# Altium PCB phoenix-c1.PcbDoc (part 1 of 3)
Units mm, origin at the board's own origin, x right, y up, seen from the top; angles counter-clockwise.
Board outline 40 x 40 mm, 4 copper layers (Top Layer, Layer 1, Layer 2, Bottom Layer), stack 1.58 mm thick; 71 components, 54 nets, 294 pads, 188 vias.
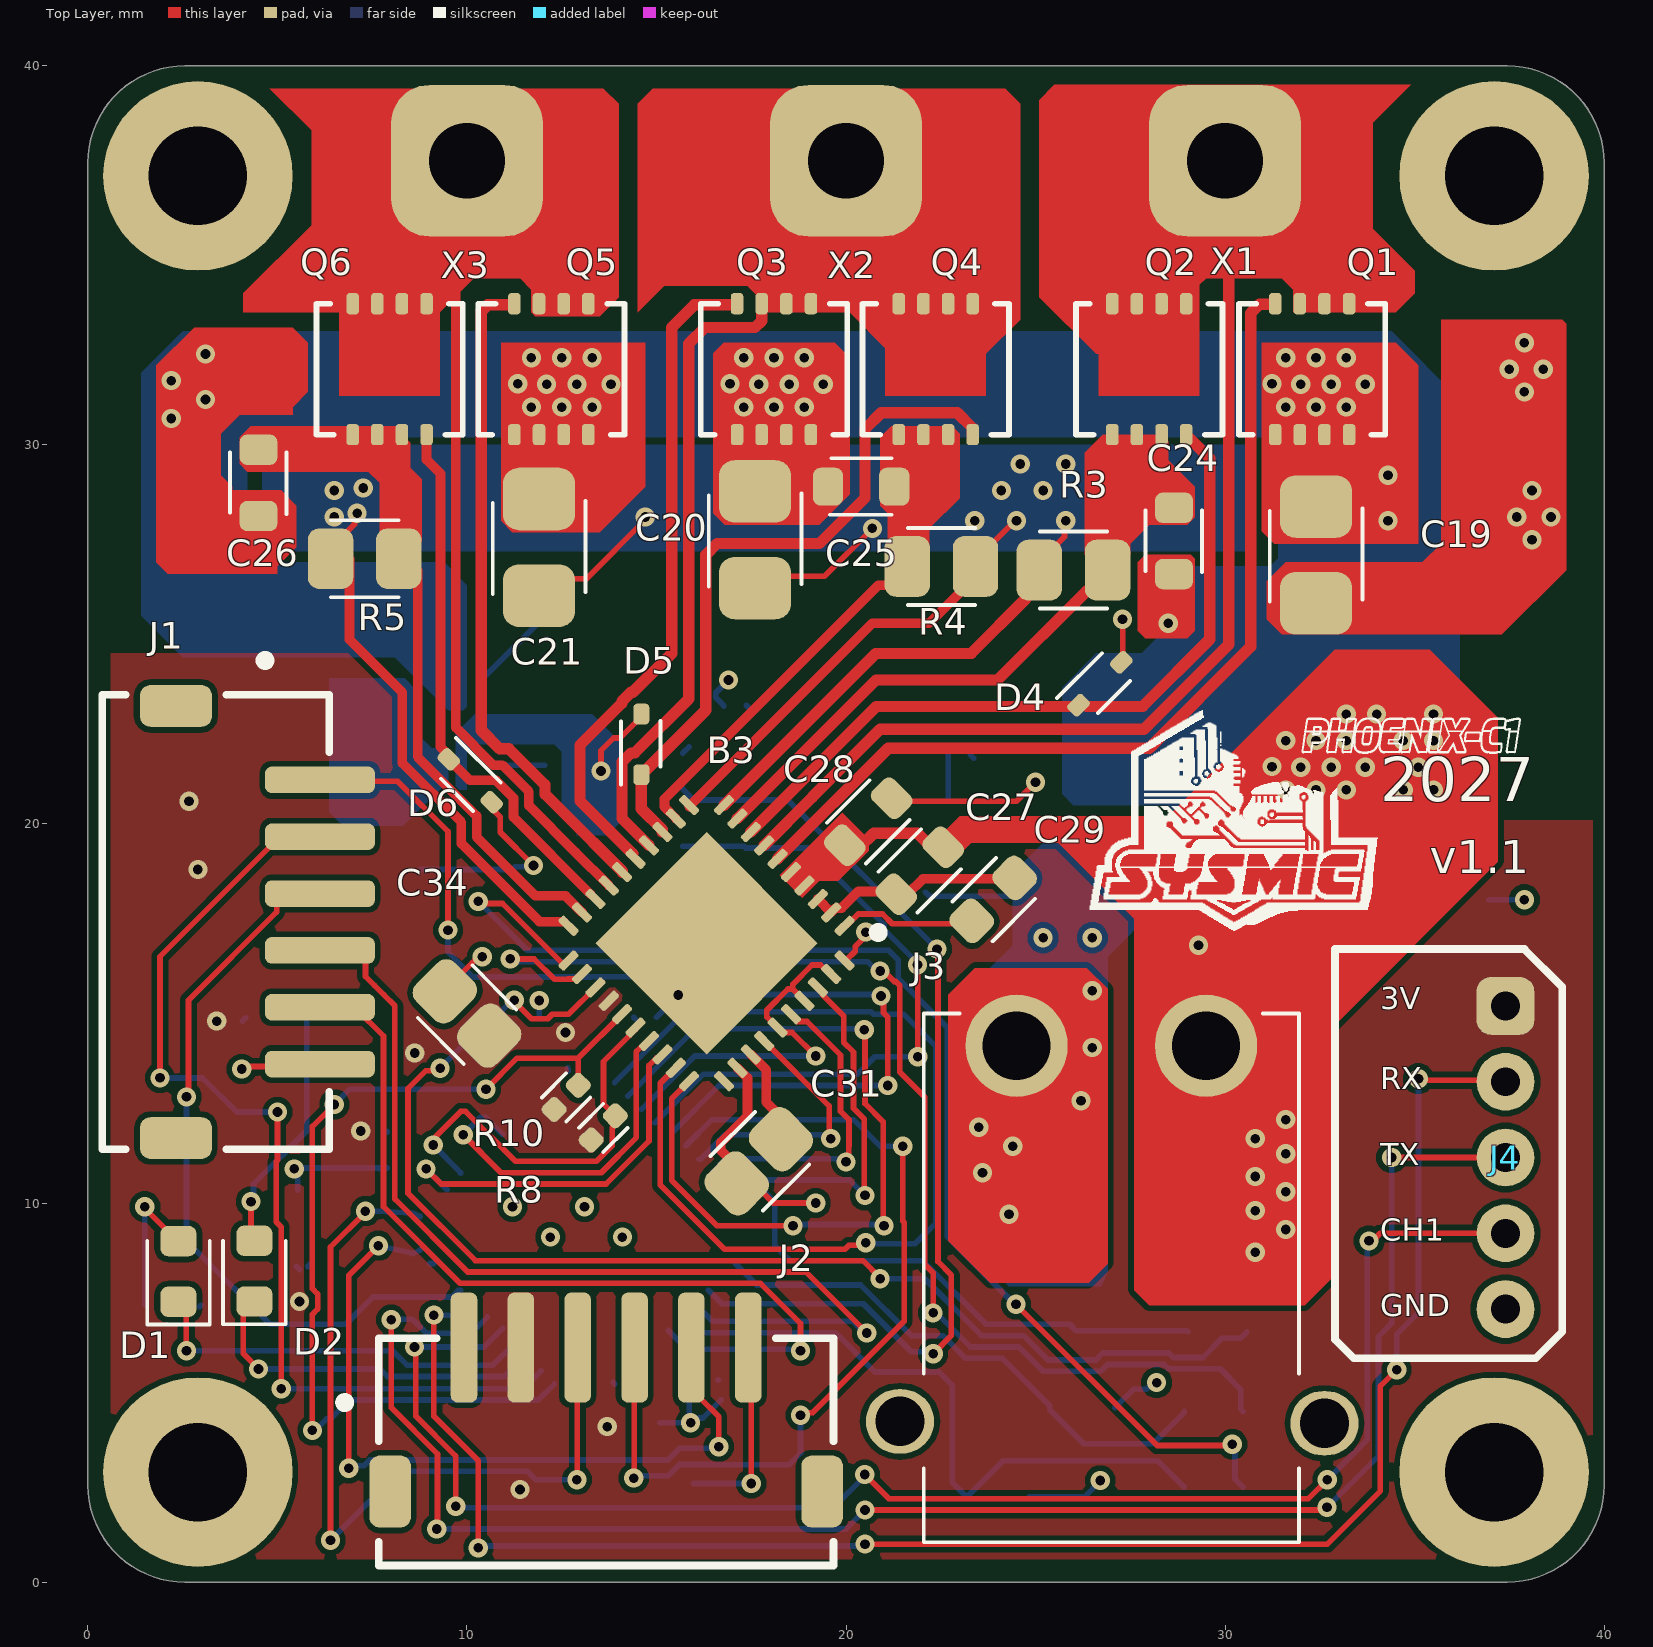
[diagram p0: Top Layer view]
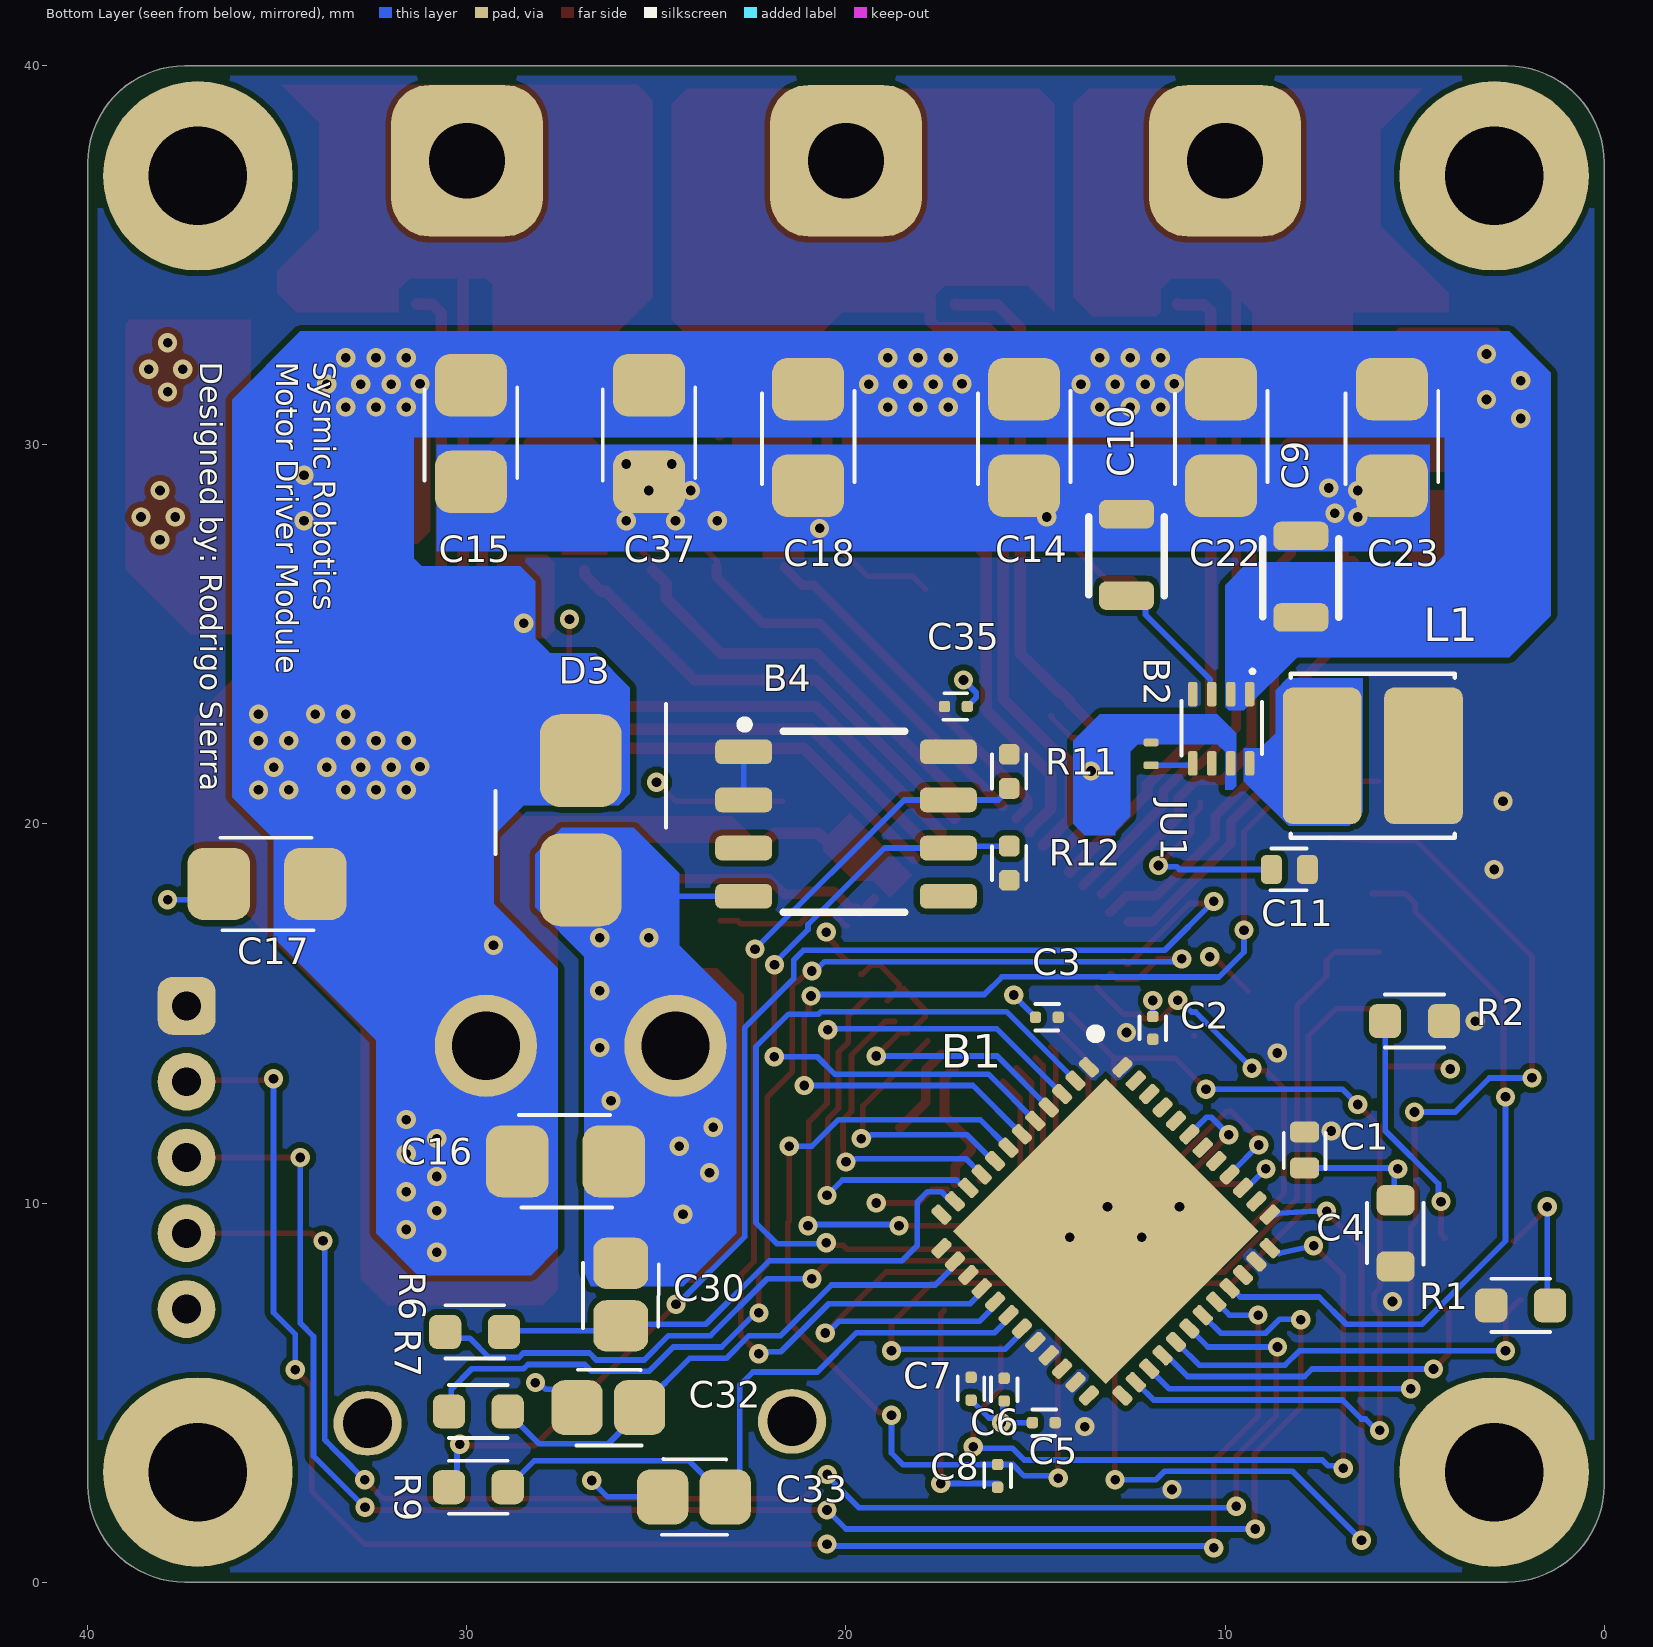
[diagram p1: Bottom Layer view, seen from below]
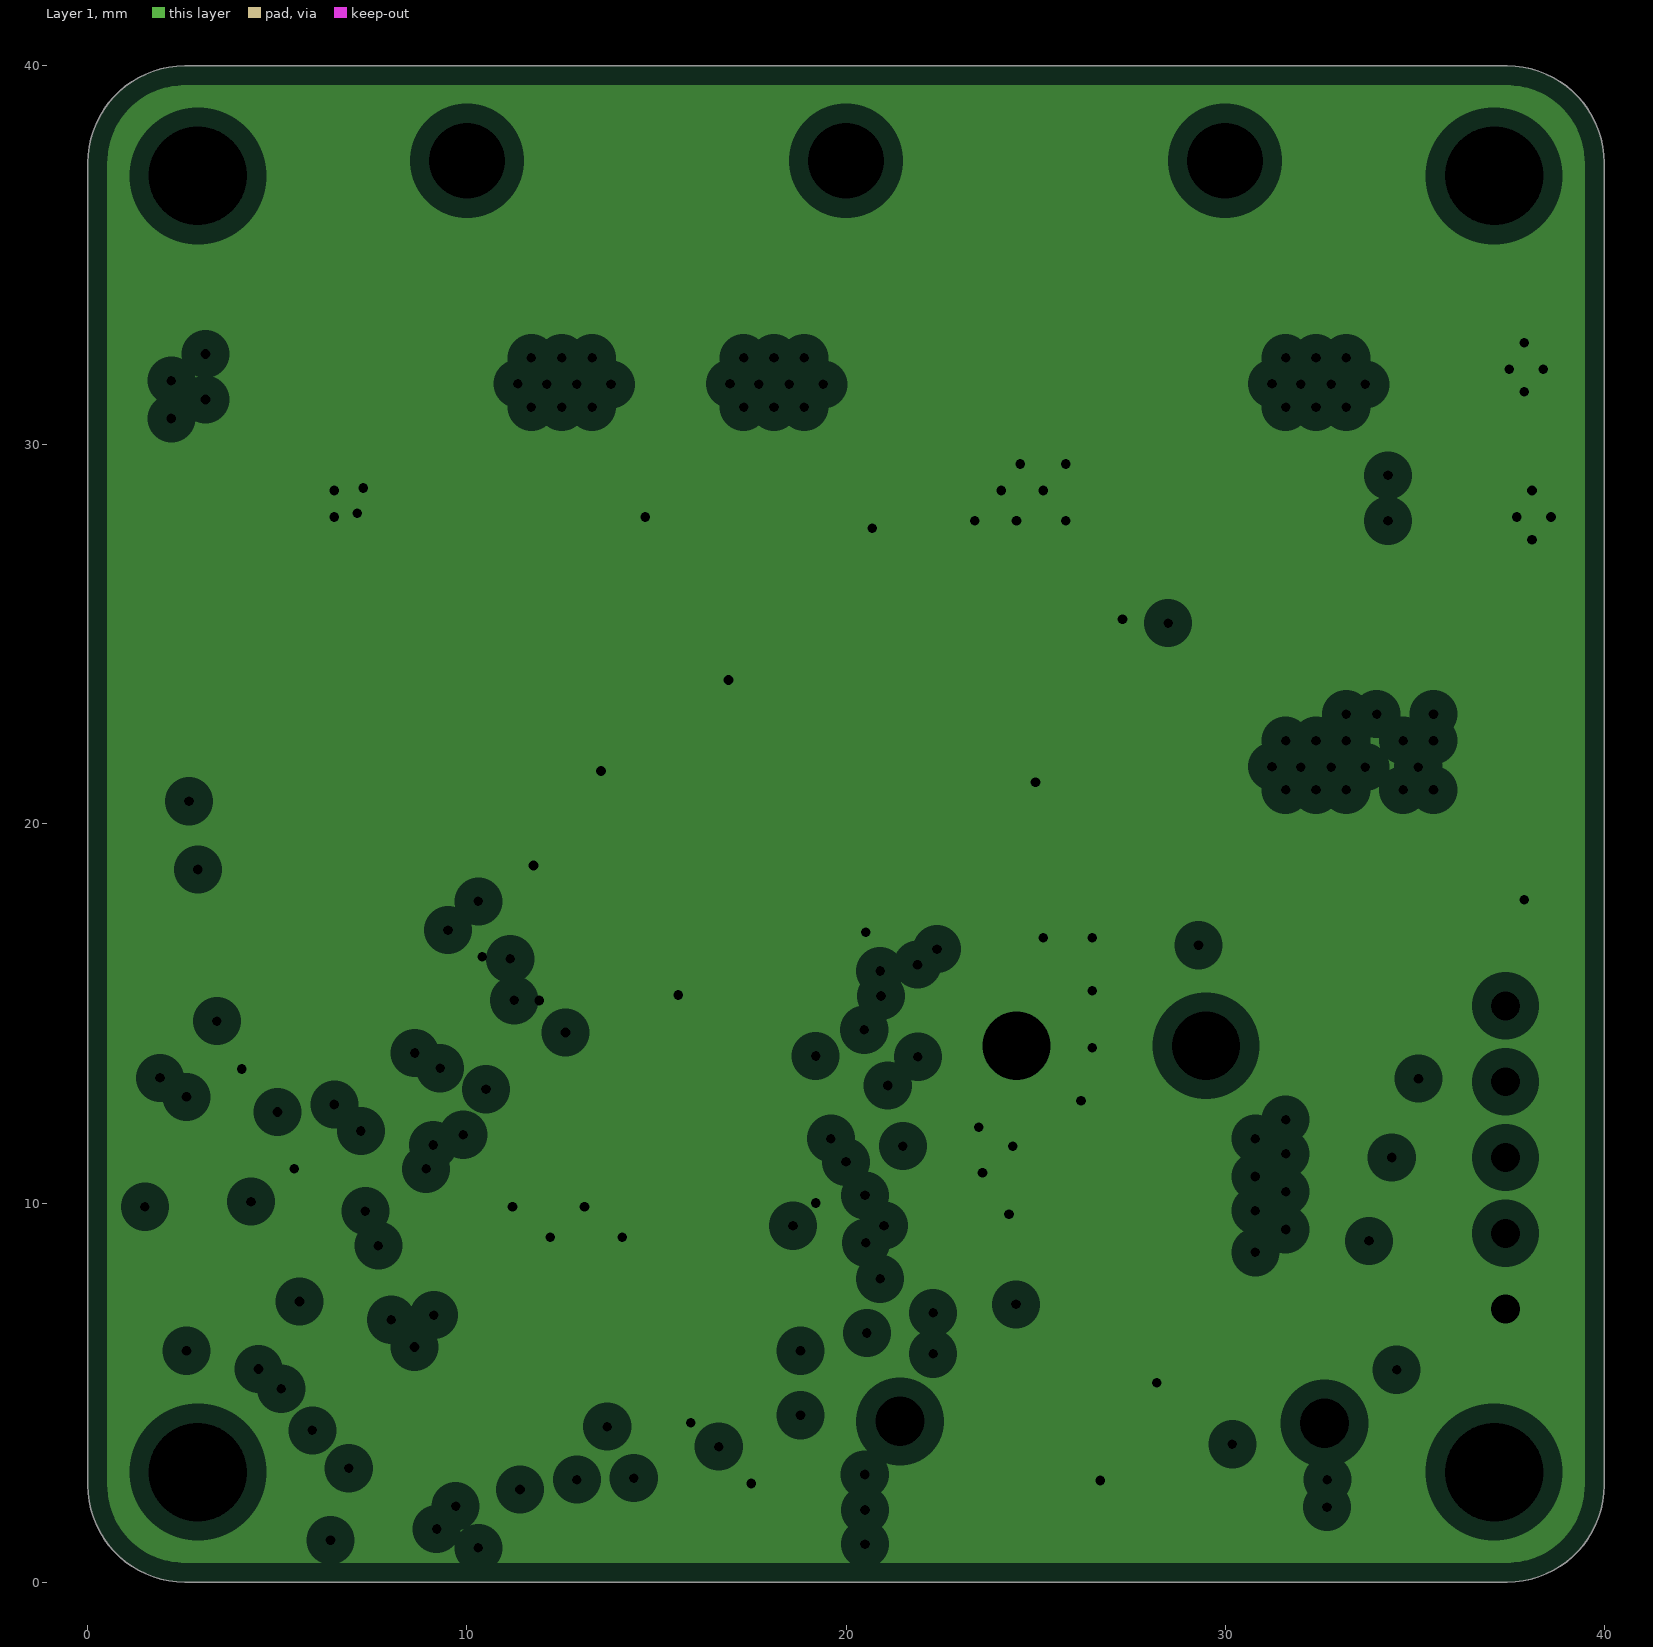
[diagram p2: Layer 1, clearances drawn from the general rule]
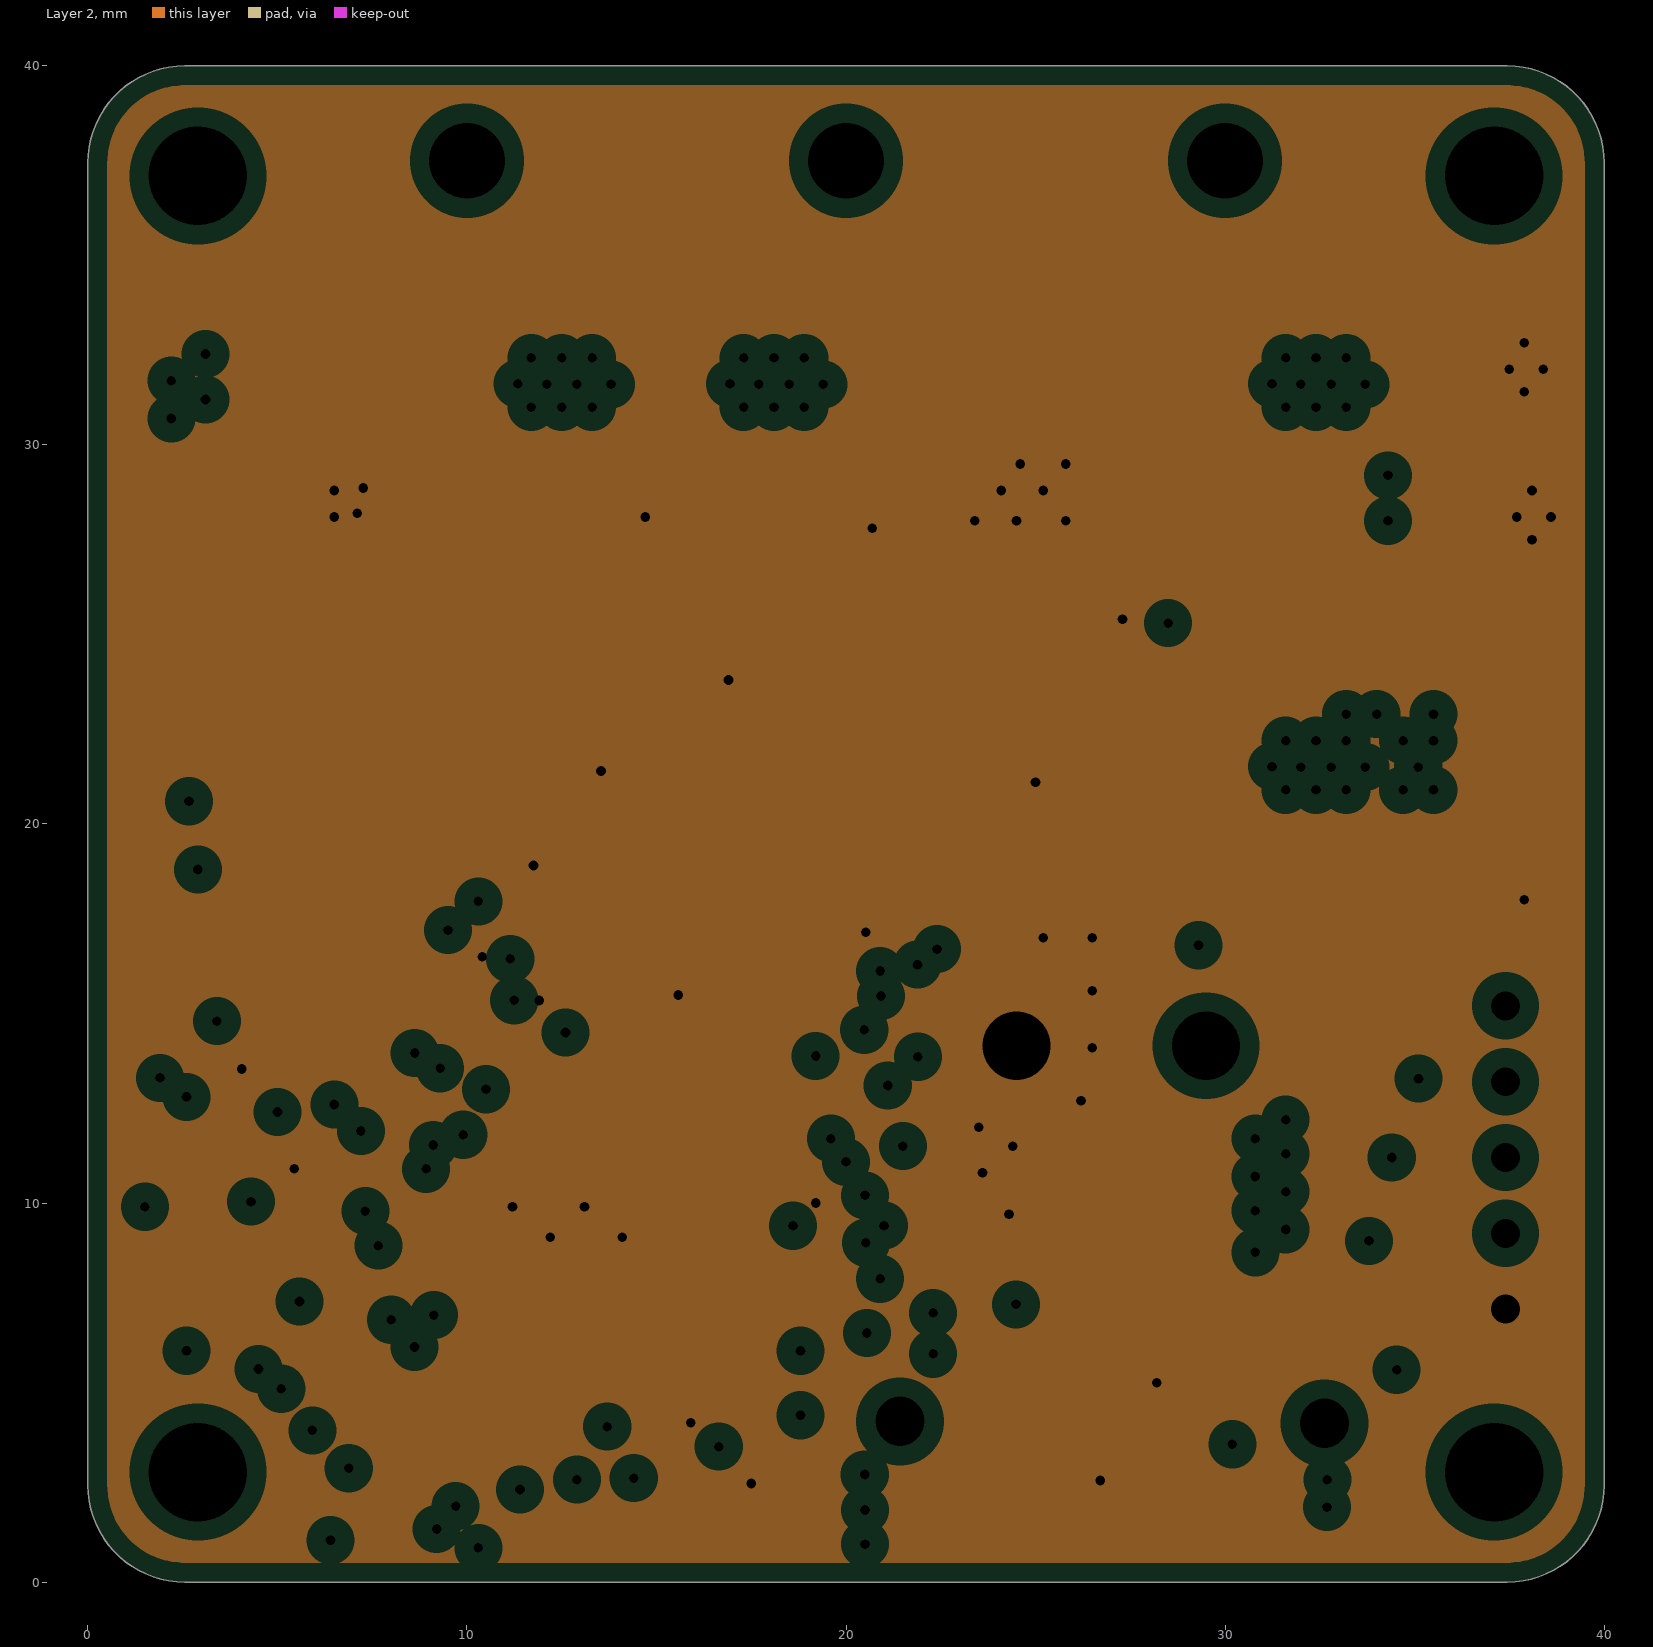
[diagram p3: Layer 2, clearances drawn from the general rule]
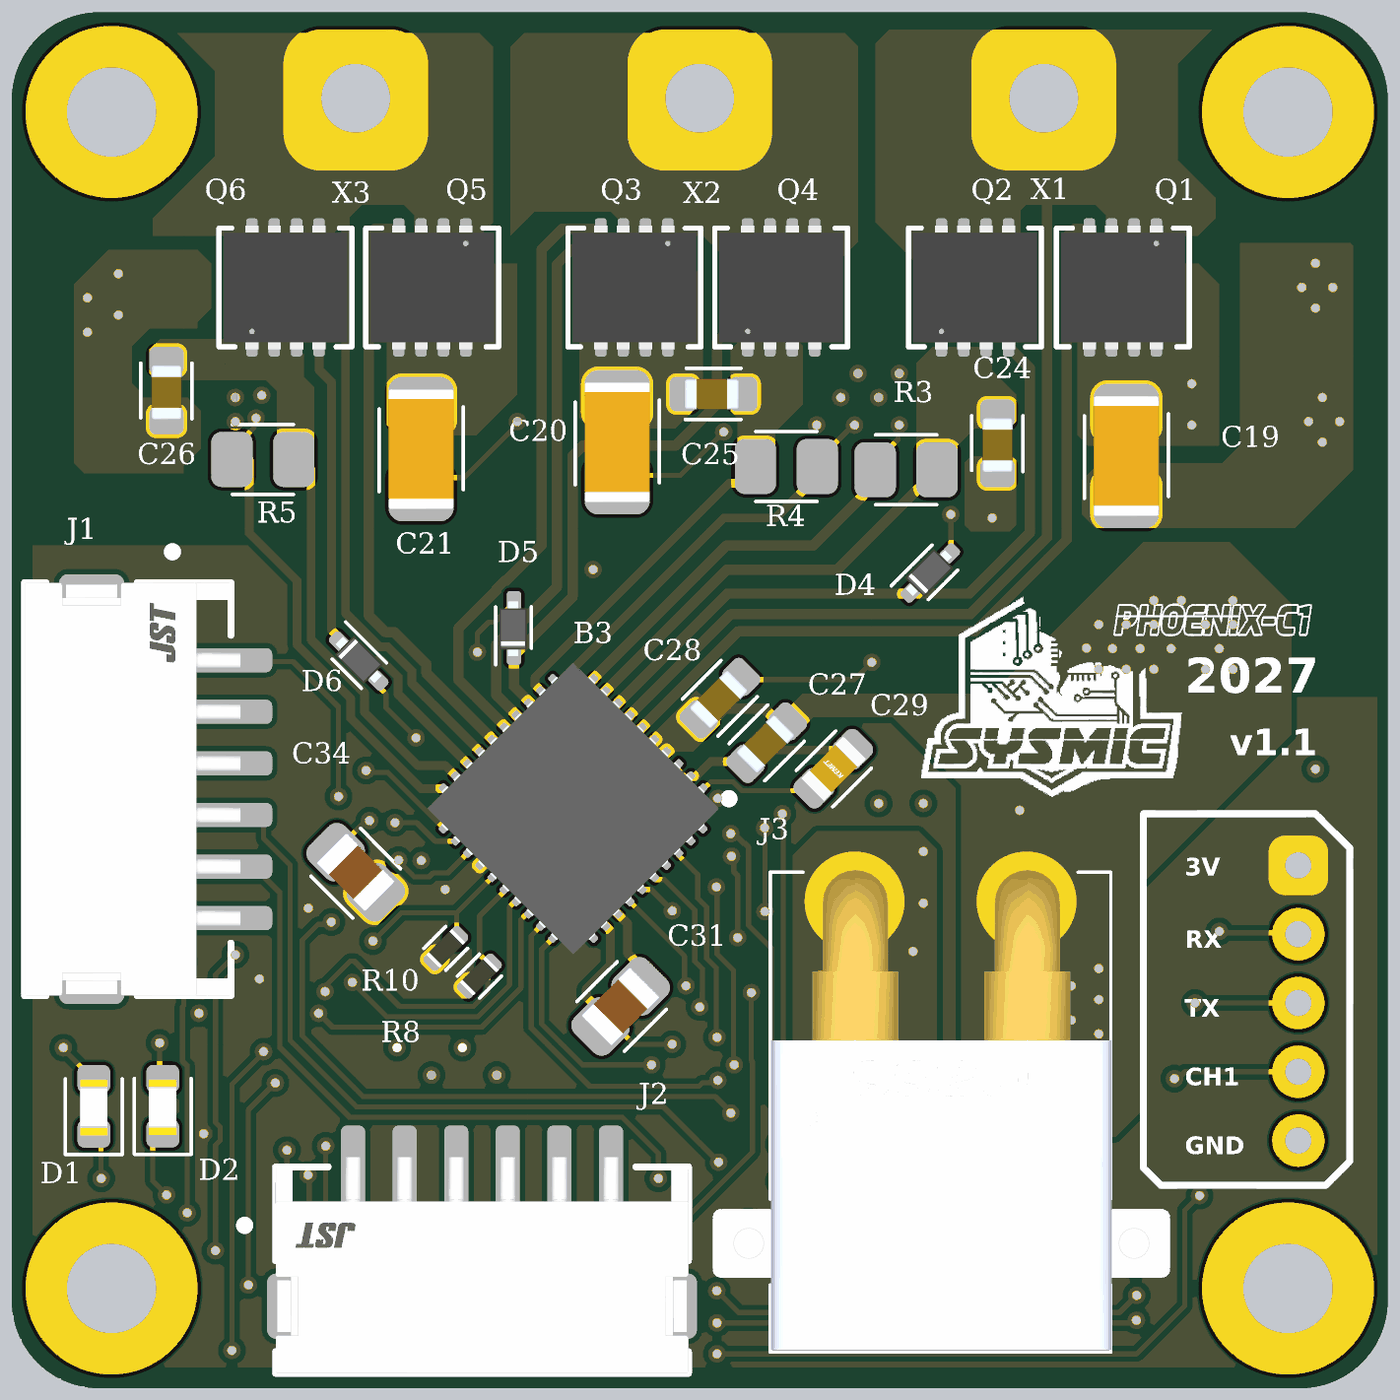
[diagram p4: 3D render of the assembled board from above, using the file's embedded part models]
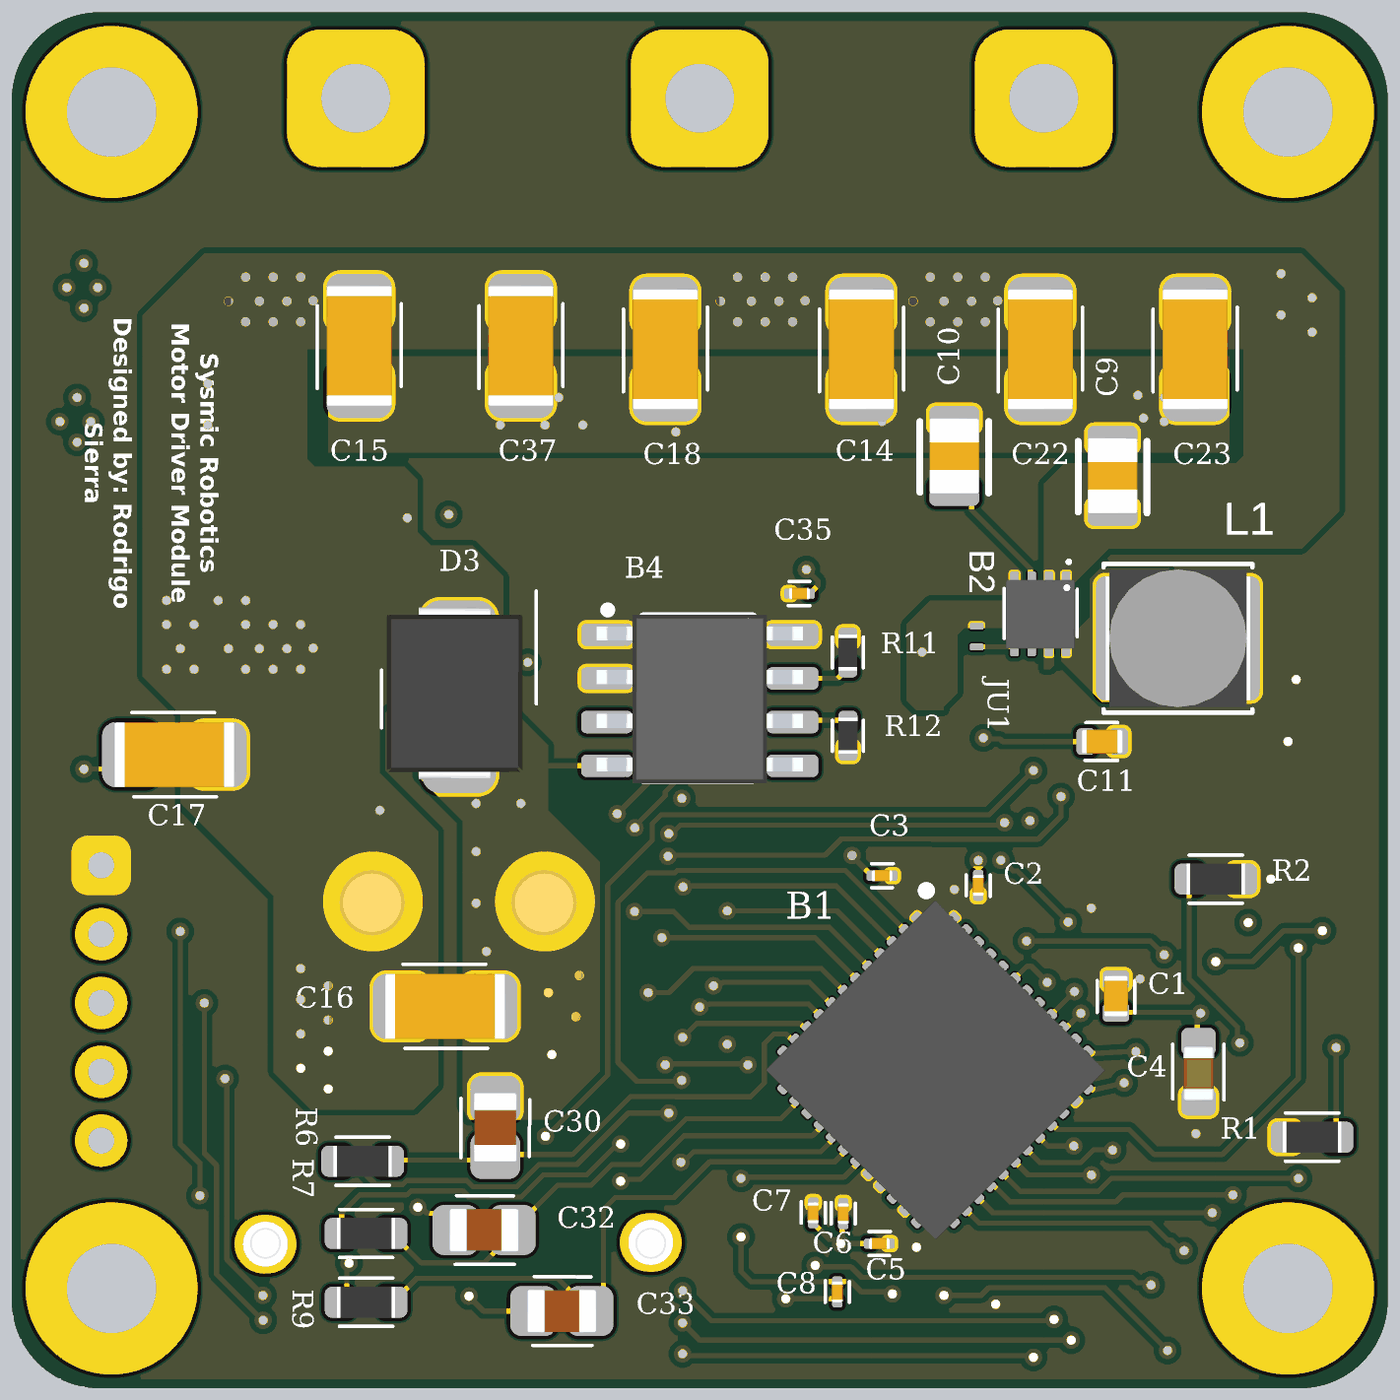
[diagram p5: 3D render of the assembled board from below, using the file's embedded part models]

## Layer stack, top to bottom
Top Solder: solder mask 0.0102, Solder Resist, Dk 3.5
Top Layer: signal copper 0.035
Dielectric 2: prepreg 0.2, PP-006, Dk 4.1
Layer 1: plane copper 0.035, net GND
Dielectric 1: dielectric 1.0397, FR-4, Dk 4.8
Layer 2: plane copper 0.035, net GND
Dielectric 3: prepreg 0.2, PP-006, Dk 4.1
Bottom Layer: signal copper 0.035
Bottom Solder: solder mask 0.0102, Solder Resist, Dk 3.5

## Board outline
0,2.55 0,37.45 cw(c2.55,37.45) 2.55,40 37.45,40 cw(c37.45,37.45) 40,37.45 40,2.55 cw(c37.45,2.55) 37.45,0 2.55,0 cw(c2.55,2.55)

## Design rules (kind name [scope] priority, off if disabled: settings)
BoardOutlineClearance [All] p1: gap=0.254 ignorepadtopadclearanceinfootprint=FALSE except(0: Arc-SplitContinuation Track-SplitContinuation SMDPad-SplitContinuation THPad-SplitContinuation Via-SplitContinuation Fill-SplitContinuation Poly-SplitContinuation Region-SplitContinuation Text-SplitContinuation; 0.25: Arc-OutlineEdge)
Clearance [All] p1: gap=0.15 ignorepadtopadclearanceinfootprint=FALSE
HoleSize [All] p1: absolutevalues=TRUE maxlimit=2.7 minlimit=0.025 maxpercent=80.000 minpercent=20.000
MinimumSolderMaskSliver [All] p1: minsoldermaskwidth=0.05
PlaneClearance [All] p1: clearance=0.508
PlaneConnect [All] p1: planeconnectstyle=Direct reliefexpansion=0.508 reliefentries=4 reliefconductorwidth=0.254 reliefairgap=0.254
PolygonConnect [All] p1: connectstyle=Direct reliefconductorwidth=0.254 reliefentries=4 polygonreliefangle="90 Angle" airgapwidth=0.254
RoutingVias [All] p1: holewidth=0.254 width=0.508 viastyle="Through Hole" minholewidth=0.254 minwidth=0.508 maxholewidth=0.254 maxwidth=0.508
SilkToSolderMaskClearance [IsPad] p1: minsilkscreentomaskgap=0.05 clearancetoexposedcopper=TRUE
SolderMaskExpansion SolderMaskExpansion_Via [IsVia] p1: expansion=0.102 istentingtop=TRUE
SolderMaskExpansion [All] p2: expansion=0.102 istentingtop=FALSE
SupplyNets "Schematic Supply Nets_2" [InNet('VCC')] p1: voltage=0.000
SupplyNets "Schematic Supply Nets_1" [InNet('+3.3V')] p2: voltage=0.000
SupplyNets "Schematic Supply Nets" [InNet('GND')] p3: voltage=0.000
Width [All] p1: maxlimit=0.3 minlimit=0.127 preferedwidth=0.15
25 further rules are at their usual default settings.

## Classes and differential pairs
component class U_stm32g4: B1 C1 C2 C3 C4 C5 C6 C7 C8
component class U_power_input: B2 C9 C10 C11 D3 J3 JU1 L1
component class U_leds: D1 D2 R1 R2
component class U_hbridgeC: C26 D6 Q5 Q6 R5 X3
component class U_hbridgeB: C25 D5 Q3 Q4 R4 X2
component class U_hbridgeA: C24 D4 Q1 Q2 R3 X1
component class U_gate_driver: B3 C27 C28 C29 C30 C31 C32 C33 C34 R6 R7 R8 R9 R10
component class U_external_ports: J1 J2 J4
component class U_encoder: B4 C35 R11 R12
component class U_bulk_capacitance: C14 C15 C16 C17 C18 C19 C20 C21 C22 C23 C37

## Components (designator, comment, footprint, x,y, rotation, side; value= is the part's Value field where it differs from the comment)
B1 "STM32G431CBU6" "48-UFQFN - STMICROELECTRONICS" 13.149,9.251 r225 bottom
B2 "MAX15062AATA+T" "8-TDFN - ANALOG" 10.1,22.5 r270 bottom
B3 "DRV8323SRTAR" "40-WQFN - TEXAS" 16.322,16.855 r225 top
B4 "AS5600-ASOM" "SOIC-8 - OSRAM" 20,20 r180 bottom
C1 "10µF" "C0402 - MURATA" 7.9,11.4 r90 bottom
C2 "4.7µF" "C0201 - MURATA" 11.904,14.62 r270 bottom
C3 "100nF" "C0201 - MURATA" 14.7,14.9 r180 bottom
C4 "1µF" "C0603 - MURATA" 5.5,9.2 r270 bottom
C5 "100nF" "C0201 - MURATA" 14.782,4.205 r180 bottom
C6 "100nF" "C0201 - MURATA" 15.828,5.074 r90 bottom
C7 "100nF" "C0201 - MURATA" 16.7,5.1 r90 bottom
C8 "100nF" "C0201 - MURATA" 16,2.8 r90 bottom
C9 "1µF" "C0805 - MURATA" 8,26.525 r270 bottom
C10 "1µF" "C0805 - MURATA" 12.6,27.1 r270 bottom
C11 "10µF" "C0402 - MURATA" 8.3,18.8 r180 bottom
C14 "4.7µF" "C1206 - MURATA" 15.3,30.2 r270 bottom
C15 "4.7µF" "C1206 - MURATA" 29.9,30.3 r270 bottom
C16 "4.7µF" "C1206 - MURATA" 27.4,11.1 r180 bottom
C17 "4.7µF" "C1206 - MURATA" 35.273,18.419 r0 bottom
C18 "4.7µF" "C1206 - MURATA" 21,30.2 r270 bottom
C19 "4.7µF" "C1206 - MURATA" 32.4,27.1 r270 top
C20 "4.7µF" "C1206 - MURATA" 17.6,27.5 r270 top
C21 "4.7µF" "C1206 - MURATA" 11.9,27.3 r270 top
C22 "4.7µF" "C1206 - MURATA" 10.1,30.2 r270 bottom
C23 "4.7µF" "C1206 - MURATA" 5.6,30.2 r270 bottom
C24 "100nF" "C0603 - MURATA" 28.656,27.468 r270 top
C25 "100nF" "C0603 - MURATA" 20.4,28.9 r180 top
C26 "100nF" "C0603 - MURATA" 4.5,29 r270 top
C27 "1µF" "C0603 - MURATA" 21.945,18.766 r225 top
C28 "100nF" "C0603 - MURATA" 20.585,20.06 r225 top
C29 "47nF" "C0603 - KEMET" 23.9,18 r45 top
C30 "1nF" "C0805 - KYOCERA" 25.943,7.585 r270 bottom
C31 "1uF" "C0805 - KYOCERA" 17.7,11.1 r45 top
C32 "1nF" "C0805 - KYOCERA" 26.27,4.6 r180 bottom
C33 "1nF" "C0805 - KYOCERA" 24.012,2.246 r180 bottom
C34 "1uF" "C0805 - KYOCERA" 10,15 r315 top
C35 "100nF" "C0201 - MURATA" 17.1,23.1 r0 bottom
C37 "4.7µF" "C1206 - MURATA" 25.2,30.3 r270 bottom
D1 "APT1608SURCK" "LED0603 - KINGBRIGHT" 2.386,8.195 r90 top
D2 "APT1608SURCK" "LED0603 - KINGBRIGHT" 4.39,8.202 r90 top
D3 "SMBJ48D-M3/I" "DDO-214AA (SMBJ) - VISHAY" 27,20.1 r270 bottom
D4 "BAT41KFILM" "DSOD-523 - STMicroelectronics" 26.7,23.7 r45 top value=3pF
D5 "BAT41KFILM" "DSOD-523 - STMicroelectronics" 14.6,22.1 r90 top value=3pF
D6 "BAT41KFILM" "DSOD-523 - STMicroelectronics" 10.086,21.14 r315 top value=3pF
J1 "S6B-ZR-SM4A-TF(LF)(SN)" FP-S6B-ZR-SM4A-TF_LF_SN-MFG 3.371,17.415 r90 top
J2 "S6B-ZR-SM4A-TF(LF)(SN)" FP-S6B-ZR-SM4A-TF_LF_SN-MFG 13.671,3.436 r180 top
J3 "XT30PW-M" "CONN - XT30PW-M" 27,8.238 r180 top
J4 "TH_UART" "CONN - TH_UART" 37.4,12.2 r0 top
JU1 "JUMPER" JUMPER 12,21.9 r270 bottom
L1 "B82464P4333M000" SRN4018-330M 6.1,21.8 r180 bottom value=33µH
Q1 "TPN19008QM,LQ" "8-TSON - TOSHIBA" 32.3,32 r270 top
Q2 "TPN19008QM,LQ" "8-TSON - TOSHIBA" 28,32 r90 top
Q3 "TPN19008QM,LQ" "8-TSON - TOSHIBA" 18.1,32 r270 top
Q4 "TPN19008QM,LQ" "8-TSON - TOSHIBA" 22.367,32 r90 top
Q5 "TPN19008QM,LQ" "8-TSON - TOSHIBA" 12.225,32 r270 top
Q6 "TPN19008QM,LQ" "8-TSON - TOSHIBA" 7.958,32 r90 top
R1 "560Ω" "R0603 - YAGEO" 2.2,7.3 r0 bottom
R2 "560Ω" "R0603 - YAGEO" 5,14.8 r180 bottom
R3 "2mΩ" "R0805 - SEI" 26,26.7 r0 top
R4 "2mΩ" "R0805 - SEI" 22.517,26.795 r180 top
R5 "2mΩ" "R0805 - SEI" 7.3,27 r0 top
R6 "22Ω" "R0603 - YAGEO" 29.8,6.6 r180 bottom
R7 "22Ω" "R0603 - YAGEO" 29.7,4.5 r180 bottom
R8 "2kΩ" "R0402 - YAGEO" 13.595,11.983 r45 top
R9 "22Ω" "R0603 - YAGEO" 29.7,2.5 r180 bottom
R10 "2kΩ" "R0402 - YAGEO" 12.618,12.786 r225 top
R11 "2kΩ" "R0402 - YAGEO" 15.694,21.389 r90 bottom
R12 "2kΩ" "R0402 - YAGEO" 15.692,18.967 r270 bottom
X1 "Motor Conector" CONN_PHASE01x01#1 30.7,37.4 r0 top
X2 "Motor Conector" CONN_PHASE01x01#2 19.8,37.6 r0 top
X3 "Motor Conector" CONN_PHASE01x01#3 9.6,37.6 r0 top

## Footprints (in the part's own frame and the unit in brackets; to place one, negate y for a bottom-side part, rotate by r counter-clockwise, add the part's x,y. Pads: shape width x height; smd on the part's side, far side on the other; paste and mask are expansions set on the pad)
"8-TDFN - ANALOG" [mm]
  rrect50% 0.65x0.25 smd mask+0.05: 1(-0.925,0.75) 2(-0.925,0.25) 3(-0.925,-0.25) 4(-0.925,-0.75) 5(0.9,-0.75) 6(0.9,-0.25) 7(0.9,0.25) 8(0.9,0.75)
  silkscreen extent -1.58,-1.05 0.7,1.07, body extent -1,-1 1,1, height 0.77
"8-TSON - TOSHIBA" [mil]
  rrect50% 22x13 smd paste+0 mask+0: 1(-68,38.39) 2(-68,12.8) 3(-68,-12.8) 4(-68,-38.39) 5(68,-38.39) 6(68,-12.8) 7(68,12.8) 8(68,38.39)
  Top Layer region: 59,-52.17 59,52.17 -27.43,52.17 -27.43,-52.17
  silkscreen extent -68,-76 68,76, body extent -71,-71 71,71, height 35
"40-WQFN - TEXAS" [mm]
  rrect50% 0.6x0.22 smd: 1(-2.9,2.25) 2(-2.9,1.75) 3(-2.9,1.25) 4(-2.9,0.75) 5(-2.9,0.25) 6(-2.9,-0.25) 7(-2.9,-0.75) 8(-2.9,-1.25) 9(-2.9,-1.75) 10(-2.9,-2.25) 21(2.9,-2.25) 22(2.9,-1.75) 23(2.9,-1.25) 24(2.9,-0.75) 25(2.9,-0.25) 26(2.9,0.25) 27(2.9,0.75) 28(2.9,1.25) 29(2.9,1.75) 30(2.9,2.25)
  rrect50% 0.22x0.6 smd: 11(-2.25,-2.9) 12(-1.75,-2.9) 13(-1.25,-2.9) 14(-0.75,-2.9) 15(-0.25,-2.9) 16(0.25,-2.9) 17(0.75,-2.9) 18(1.25,-2.9) 19(1.75,-2.9) 20(2.25,-2.9) 31(2.25,2.9) 32(1.75,2.9) 33(1.25,2.9) 34(0.75,2.9) 35(0.25,2.9) 36(-0.25,2.9) 37(-0.75,2.9) 38(-1.25,2.9) 39(-1.75,2.9) 40(-2.25,2.9)
  rect 4.15x4.15 smd paste-2539.97: 41(0,0)
  silkscreen extent -3.52,2.88 -3.28,3.12, body extent -3.05,-3.05 3.05,3.05, height 0.8
"48-UFQFN - STMICROELECTRONICS" [mm]
  rrect50% 0.55x0.3 smd mask+0.05: 1(-3.375,2.75) 2(-3.375,2.25) 3(-3.375,1.75) 4(-3.375,1.25) 5(-3.375,0.75) 6(-3.375,0.25) 7(-3.375,-0.25) 8(-3.375,-0.75) 9(-3.375,-1.25) 10(-3.375,-1.75) 11(-3.375,-2.25) 12(-3.375,-2.75) 25(3.375,-2.75) 26(3.375,-2.25) 27(3.375,-1.75) 28(3.375,-1.25) 29(3.375,-0.75) 30(3.375,-0.25) 31(3.375,0.25) 32(3.375,0.75) 33(3.375,1.25) 34(3.375,1.75) 35(3.375,2.25) 36(3.375,2.75)
  rrect50% 0.3x0.55 smd mask+0.05: 13(-2.75,-3.375) 14(-2.25,-3.375) 15(-1.75,-3.375) 16(-1.25,-3.375) 17(-0.75,-3.375) 18(-0.25,-3.375) 19(0.25,-3.375) 20(0.75,-3.375) 21(1.25,-3.375) 22(1.75,-3.375) 23(2.25,-3.375) 24(2.75,-3.375) 37(2.75,3.375) 38(2.25,3.375) 39(1.75,3.375) 40(1.25,3.375) 41(0.75,3.375) 42(0.25,3.375) 43(-0.25,3.375) 44(-0.75,3.375) 45(-1.25,3.375) 46(-1.75,3.375) 47(-2.25,3.375) 48(-2.75,3.375)
  rect 5.7x5.7 smd paste-2539.97 mask+0.05: 49(0,0)
  silkscreen extent -4,3.38 -3.75,3.62, body extent -3.5,-3.5 3.5,3.5, height 0.57
"C0201 - MURATA" [mm] "Chip Capacitor, 2-Leads, Body 0,60x0,30mm, IPC Medium Density"
  rrect50% 0.3x0.3 smd: 1(-0.3,0) 2(0.3,0)
  silkscreen extent -0.3,-0.35 0.33,0.35, body extent -0.32,-0.17 0.32,0.17, height 0.33
"C0402 - MURATA" [mm] "Chip Capacitor, 2-Leads, Body 1,00x0,50mm, IPC Medium Density"
  rrect50% 0.55x0.77 smd: 1(-0.475,0) 2(0.475,0)
  silkscreen extent -0.5,-0.55 0.45,0.55, body extent -0.6,-0.35 0.6,0.35, height 0.7
"C0603 - KEMET" [mm] "Chip Capacitor, 2-Leads, Body 1,60x0,80mm, IPC Medium Density"
  rrect50% 0.95x1 smd: 1(-0.805,0.02) 2(0.795,0.02)
  silkscreen extent -0.8,-0.75 0.82,0.74, body extent -0.87,-0.46 0.88,0.49, height 0.87
"C0603 - MURATA" [mm] "Chip Capacitor, 2-Leads, Body 1,60x0,80mm, IPC Medium Density"
  rrect50% 0.8x1 smd: 1(-0.875,0) 2(0.875,0)
  silkscreen extent -0.8,-0.75 0.82,0.74, body extent -0.75,-0.45 0.85,0.45, height 0.78
"C0805 - KYOCERA" [mm] "Chip Capacitor, 2-Leads, Body 2,01x1,25mm, IPC Medium Density"
  rrect50% 1.35x1.45 smd: 1(-0.825,0) 2(0.825,0)
  silkscreen extent -0.84,-1 0.88,1, body extent -1,-0.63 1,0.63, height 0.94
"C0805 - MURATA" [mm] "Chip Capacitor, 2-Leads, Body 2,00x1,25mm, IPC Medium Density"
  rrect50% 0.75x1.45 smd: 1(-1.075,0) 2(1.075,0)
  silkscreen extent -1,-1 1.07,1, body extent -1.1,-0.72 1.1,0.72, height 1.45
"C1206 - MURATA" [mm] "Chip Capacitor, 2-Leads, Body 3,20x1,60mm, IPC Medium Density"
  rrect50% 1.65x1.9 smd: 1(-1.275,0) 2(1.275,0)
  silkscreen extent -1.22,-1.22 1.23,1.22, body extent -1.75,-0.95 1.75,0.95, height 1.9
"CONN - TH_UART" [mil]
  rrect50% 60x60 hole 30: 1(0,118.11)
  round 60 hole 30: 2(0,39.37) 3(0,-39.37) 4(0,-118.11) 5(0,-196.85)
"CONN - XT30PW-M" [mm]
  round 2.7 hole 1.8: 1(2.5,-5.912) 2(-2.5,-5.912)
  oval 1.8x1.7 hole 1.3: 3(5.575,4) 4(-5.625,4.05)
  silkscreen extent -4.95,-6.76 4.95,7.19, body extent -6.68,-6.83 6.62,7.12, height 5.15
CONN_PHASE01x01#1 [mm] "Conector for motor2"
  rrect50% 4x4 hole 2 mask+0.102: 1(-0.7,0.1)
CONN_PHASE01x01#2 [mm] "Conector for motor2"
  rrect50% 4x4 hole 2 mask+0.102: 1(0.2,-0.1)
CONN_PHASE01x01#3 [mm] "Conector for motor2"
  rrect50% 4x4 hole 2 mask+0.102: 1(0.4,-0.1)
"DDO-214AA (SMBJ) - VISHAY" [mm] "Molded Diode, 2-Leads, Body 4,31x3,62mm, IPC Medium Density"
  rrect50% 2.45x2.15 smd: 1(-1.575,0) 2(1.575,0)
  silkscreen extent -3.08,-2.25 0.9,2.25, body extent -2.6,-2.1 2.4,1.85, height 2.44
"DSOD-523 - STMicroelectronics" [mm]
  rrect50% 0.55x0.42 smd: 1(-0.8,0) 2(0.8,0)
  silkscreen extent -1.07,-0.51 0.62,0.53, body extent -0.83,-0.37 0.77,0.43, height 0.7
FP-S6B-ZR-SM4A-TF_LF_SN-MFG [mm]
  rrect50% 0.7x2.9 smd paste+0 mask+0: 1(3.75,-2.75) 2(2.25,-2.75) 3(0.75,-2.75) 4(-0.75,-2.75) 5(-2.25,-2.75) 6(-3.75,-2.75)
  rrect50% 1.1x1.9 smd paste+0 mask+0: 7(-5.7,1.05) 8(5.7,1.05)
  silkscreen extent -6,-3 7.02,3, body extent -6.35,-4.3 6.35,3.1, height 0.25
JUMPER [mm]
  rrect50% 0.2x0.4 smd mask+0.05: 1(-0.25,0.05) 2(0.35,0.05)
"LED0603 - KINGBRIGHT" [mm]
  rrect50% 0.8x0.95 smd: 1(-0.8,0) 2(0.8,0)
  silkscreen extent -1.4,-0.82 0.8,0.82, body extent -0.84,-0.4 0.77,0.4, height 0.75
"R0402 - YAGEO" [mm] "Chip Resistor, 2-Leads, Body 1,00x0,50mm, IPC Medium Density"
  rrect50% 0.55x0.55 smd: 1(-0.45,0) 2(0.45,0)
  silkscreen extent -0.45,-0.45 0.45,0.45, body extent -0.53,-0.28 0.53,0.28, height 0.4
"R0603 - YAGEO" [mm]
  rrect50% 0.85x0.9 smd: 1(-0.775,0) 2(0.775,0)
  silkscreen extent -0.77,-0.7 0.77,0.7, body extent -0.85,-0.45 0.85,0.45, height 0.55
"R0805 - SEI" [mm] "Chip Resistor, 2-Leads, Body 2,05x1,30mm, IPC Medium Density"
  rrect50% 1.2x1.6 smd: 1(-0.9,0) 2(0.9,0)
  silkscreen extent -0.89,-1.02 0.89,1.02, body extent -1.15,-0.8 1.15,0.8, height 0.55
"SOIC-8 - OSRAM" [mm]
  rrect50% 1.5x0.65 smd: 1(-2.7,1.905) 2(-2.7,0.635) 3(-2.7,-0.635) 4(-2.7,-1.905) 5(2.7,-1.905) 6(2.7,-0.635) 7(2.7,0.635) 8(2.7,1.905)
  silkscreen extent -2.77,-2.32 1.55,2.72, body extent -3,-2.41 3,2.49, height 1.75
SRN4018-330M [mm] "Precision Wire Wound Inductor, 2-Leads, Body 4.00x4.00mm, IPC High Density"
  rrect25% 2.075x3.6 smd: 1(-1.338,0) 2(1.338,0)
  silkscreen extent -2.16,-2.16 2.16,2.16, body extent -2.1,-2 2.1,2, height 1.98

## Part data
B1: "STMICROELECTRONICS - STM32G431CBU6 - MCU, 32BIT, 170MHZ, UFQFPN-48", Manufacturer_Name=STMicroelectronics, Mouser Part Number=511-STM32G431CBU6, Datasheet Link=https://www.st.com/resource/en/datasheet/stm32g431cb.pdf, Geometry.Height=0.65mm, Manufacturer_Part_Number=STM32G431CBU6, Mouser Price/Stock=https://www.mouser.co.uk/ProductDetail/STMicroelectronics/STM32G431CBU6?qs=T3oQrply3y%252B0hTuSHQ7oqA%3D%3D, Supplier 1=Mouser, Supplier Part Number 1=511-STM32G431CBU6
B2: "Step-Down 60V, 300mA, Ultra-Small, High-Efficiency, Synchronous  DC-DC Converters", Manufacturer_Name="Analog Devices", Mouser Part Number=700-MAX15062AATA+T, Datasheet Link=https://www.analog.com/MAX15062/datasheet, Geometry.Height=0.8mm, Manufacturer_Part_Number=MAX15062AATA+T, Mouser Price/Stock=https://www.mouser.co.uk/ProductDetail/Analog-Devices-Maxim-Integrated/MAX15062AATA%2bT?qs=ffX8NcjNb2RbIuhbYBH8PA%3D%3D, Supplier 1=Mouser, Supplier Part Number 1=700-MAX15062AATA+T
B3: "Gate Drivers 60V Three-Phase Smart Gate Driver With Three Current Shunt Amplifiers 40-WQFN -40 to 125", Manufacturer_Name="Texas Instruments", Mouser Part Number=595-DRV8323SRTAR, Datasheet Link=http://www.ti.com/lit/ds/symlink/drv8323.pdf, Geometry.Height=0.8mm, Manufacturer_Part_Number=DRV8323SRTAR, Mouser Price/Stock=https://www.mouser.co.uk/ProductDetail/Texas-Instruments/DRV8323SRTAR?qs=u4fy%2FsgLU9P2gpPTX6mffg%3D%3D, Supplier 1=Mouser, Supplier Part Number 1=595-DRV8323SRTAR
B4: "IC SENSOR MAG ROTARY 12BIT 8SOIC", Manufacturer_Name="ams OSRAM", Mouser Part Number=985-AS5600-ASOM, Datasheet Link=https://datasheet.datasheetarchive.com/originals/distributors/DKDS-11/214624.pdf, Geometry.Height=1.75mm, Manufacturer_Part_Number=AS5600-ASOM, Mouser Price/Stock=https://www.mouser.co.uk/ProductDetail/ams-OSRAM/AS5600-ASOM?qs=KTMMzrZdriG6aU1h9lJCUQ%3D%3D, Supplier 1=Mouser, Supplier Part Number 1=985-AS5600-ASOM
C1 C11: library part GRM155R60J106ME05D, "Ceramic Capacitor, Ceramic, 6.3V, 20% +Tol, 20% -Tol, X5R, 15% TC, 10uF, Surface Mount, 0402", .Case/Package=0402, .Voltage Rating (DC)=6.3V, Dielectric=X5R, Dielectric Material=Ceramic, Manufacturer=Murata, Manufacturer Lifecycle Status="IN PRODUCTION", Max Operating Temperature=85°C, Min Operating Temperature=-55°C, Supplier Part Number=81-GRM155R60J106M05D, Tolerance=20%, Case/Package=0402, Category="Ceramic Capacitors", ComponentLink1Description=https://datasheet.octopart.com:443/GRM155R60J106ME05D-Murata-datasheet-155239051.pdf?src-supplier=Newark, ComponentLink1URL=https://datasheet.octopart.com:443/GRM155R60J106ME05D-Murata-datasheet-155239051.pdf?src-supplier=Newark, ComponentLink2Description=https://datasheet.octopart.com:443/GRM155R60J106ME05D-Murata-datasheet-165579666.pdf?src-supplier=TME, ComponentLink2URL=https://datasheet.octopart.com:443/GRM155R60J106ME05D-Murata-datasheet-165579666.pdf?src-supplier=TME, ComponentLink3Description=https://datasheet.octopart.com:443/GRM155R60J106ME05D-Murata-datasheet-141266224.pdf?src-supplier=Ciiva, ComponentLink3URL=https://datasheet.octopart.com:443/GRM155R60J106ME05D-Murata-datasheet-141266224.pdf?src-supplier=Ciiva, ComponentLink4Description=https://datasheet.octopart.com:443/GRM155R60J106ME05D-Murata-datasheet-140689296.pdf?src-supplier=Ciiva, ComponentLink4URL=https://datasheet.octopart.com:443/GRM155R60J106ME05D-Murata-datasheet-140689296.pdf?src-supplier=Ciiva, ComponentLink5Description=https://datasheet.octopart.com:443/GRM155R60J106ME05D-Murata-datasheet-138740637.pdf?src-supplier=Ciiva, ComponentLink5URL=https://datasheet.octopart.com:443/GRM155R60J106ME05D-Murata-datasheet-138740637.pdf?src-supplier=Ciiva, ComponentLink6Description=https://datasheet.octopart.com/GRM155R60J106ME05D-Murata-datasheet-12515295.pdf, ComponentLink6URL=https://datasheet.octopart.com/GRM155R60J106ME05D-Murata-datasheet-12515295.pdf, ComponentLink7Description=https://datasheet.octopart.com/GRM155R60J106ME05D-Murata-datasheet-12510076.pdf, ComponentLink7URL=https://datasheet.octopart.com/GRM155R60J106ME05D-Murata-datasheet-12510076.pdf, ComponentLink8Description=https://datasheet.octopart.com/GRM155R60J106ME05D-Murata-datasheet-11978611.pdf, ComponentLink8URL=https://datasheet.octopart.com/GRM155R60J106ME05D-Murata-datasheet-11978611.pdf, ComponentLink9Description=https://datasheet.octopart.com/GRM155R60J106ME05D-Murata-datasheet-10025737.pdf, ComponentLink9URL=https://datasheet.octopart.com/GRM155R60J106ME05D-Murata-datasheet-10025737.pdf, ComponentLink10Description=https://datasheet.octopart.com/GRM155R60J106ME05D-Murata-datasheet-8819587.pdf, ComponentLink10URL=https://datasheet.octopart.com/GRM155R60J106ME05D-Murata-datasheet-8819587.pdf, ComponentLink11Description=http://sigma.octopart.com:80/reach_statement/Murata-company-16.pdf?src-supplier=Compliance+Statements, ComponentLink11URL=http://sigma.octopart.com:80/reach_statement/Murata-company-16.pdf?src-supplier=Compliance+Statements, Height=500µm, Length=1mm, Lifecycle Status=Production, Manufacturer Part Number=GRM155R60J106ME05D, Material=Ceramic, Mounting Technology="Surface Mount", Number of Terminals=2, Pricing="1=0,1, 10=0,021, 50=0,021, 100=0,019, 1000=0,018, 10000=0,014 (USD)", REACH SVHC=Yes, RoHS=Compliant, Schedule B=8532240020|8532240020|8532240020|8532240020|8532240020|8532240020|8532240020|8532240020|8532240020|8532240020|8532240020|8532240020|8532240020|8532240020|8532240020|8532240020|8532240020|8532240020|8532240020|8532240020|8532240020|8532240020|8532240020|85, Stock=374888, Supplier=Mouser, Supplier 1=Mouser, Supplier Part Number 1=81-GRM155R60J106M05D, Thickness=500µm, Voltage Rating=6.3V, Voltage Rating (DC)=6.3V, Width=500µm
C2: library part GRM035R60J475ME15D, "Ceramic Capacitor, Ceramic, 6.3V, 20% +Tol, 20% -Tol, X5R, 15% TC, 4.7uF, Surface Mount, 0201", .Case/Package=0201, .Voltage Rating (DC)=6.3V, Case Code (Metric)=0603, Dielectric=X5R, Dielectric Material=Ceramic, Manufacturer=Murata, Manufacturer Lifecycle Status="IN PRODUCTION", Max Operating Temperature=85°C, Min Operating Temperature=-55°C, Supplier Part Number=81-GRM035R60J475ME5D, Tolerance=20%, Case Code (Imperial)=0201, Case/Package=0201, Category="Ceramic Capacitors", ComponentLink1Description=https://datasheet.octopart.com:443/GRM035R60J475ME15D-Murata-datasheet-149522819.pdf?src-supplier=Farnell, ComponentLink1URL=https://datasheet.octopart.com:443/GRM035R60J475ME15D-Murata-datasheet-149522819.pdf?src-supplier=Farnell, ComponentLink2Description=https://datasheet.octopart.com:443/GRM035R60J475ME15D-Murata-datasheet-165579666.pdf?src-supplier=TME, ComponentLink2URL=https://datasheet.octopart.com:443/GRM035R60J475ME15D-Murata-datasheet-165579666.pdf?src-supplier=TME, ComponentLink3Description=https://datasheet.octopart.com:443/GRM035R60J475ME15D-Murata-datasheet-140678601.pdf?src-supplier=Ciiva, ComponentLink3URL=https://datasheet.octopart.com:443/GRM035R60J475ME15D-Murata-datasheet-140678601.pdf?src-supplier=Ciiva, ComponentLink4Description=https://datasheet.octopart.com:443/GRM035R60J475ME15D-Murata-datasheet-140677062.pdf?src-supplier=Ciiva, ComponentLink4URL=https://datasheet.octopart.com:443/GRM035R60J475ME15D-Murata-datasheet-140677062.pdf?src-supplier=Ciiva, ComponentLink5Description=https://datasheet.octopart.com:443/GRM035R60J475ME15D-Murata-datasheet-138738751.pdf?src-supplier=Ciiva, ComponentLink5URL=https://datasheet.octopart.com:443/GRM035R60J475ME15D-Murata-datasheet-138738751.pdf?src-supplier=Ciiva, ComponentLink6Description=https://datasheet.octopart.com:443/GRM035R60J475ME15D-Murata-datasheet-140089765.pdf?src-supplier=Future+Electronics, ComponentLink6URL=https://datasheet.octopart.com:443/GRM035R60J475ME15D-Murata-datasheet-140089765.pdf?src-supplier=Future+Electronics, ComponentLink7Description=https://datasheet.octopart.com/GRM035R60J475ME15D-Murata-datasheet-12515295.pdf, ComponentLink7URL=https://datasheet.octopart.com/GRM035R60J475ME15D-Murata-datasheet-12515295.pdf, ComponentLink8Description=https://datasheet.octopart.com/GRM035R60J475ME15D-Murata-datasheet-12510076.pdf, ComponentLink8URL=https://datasheet.octopart.com/GRM035R60J475ME15D-Murata-datasheet-12510076.pdf, ComponentLink9Description=https://datasheet.octopart.com/GRM035R60J475ME15D-Murata-datasheet-11978611.pdf, ComponentLink9URL=https://datasheet.octopart.com/GRM035R60J475ME15D-Murata-datasheet-11978611.pdf, ComponentLink10Description=https://datasheet.octopart.com/GRM035R60J475ME15D-Murata-datasheet-10025737.pdf, ComponentLink10URL=https://datasheet.octopart.com/GRM035R60J475ME15D-Murata-datasheet-10025737.pdf, ComponentLink11Description=https://datasheet.octopart.com/GRM035R60J475ME15D-Murata-datasheet-8819587.pdf, ComponentLink11URL=https://datasheet.octopart.com/GRM035R60J475ME15D-Murata-datasheet-8819587.pdf, ComponentLink12Description=http://sigma.octopart.com:80/reach_statement/Murata-company-16.pdf?src-supplier=Compliance+Statements, ComponentLink12URL=http://sigma.octopart.com:80/reach_statement/Murata-company-16.pdf?src-supplier=Compliance+Statements, Height=500µm, Length=600µm, Lifecycle Status=Production, Manufacturer Part Number=GRM035R60J475ME15D, Material=Ceramic, Mounting Technology="Surface Mount", Number of Terminals=2, Pricing="1=0,1, 10=0,039, 50=0,039, 100=0,039, 1000=0,039, 10000=0,033 (USD)", REACH SVHC=Yes, RoHS=Compliant, Schedule B="8532240020, 8532240020|8532240020, 8532240020|8532240020|8532240020, 8532240020|8532240020|8532240020|8532240020", Stock=788914, Supplier=Mouser, Supplier 1=Mouser, Supplier Part Number 1=81-GRM035R60J475ME5D, Thickness=500µm, Voltage Rating=6.3V, Voltage Rating (DC)=6.3V, Width=300µm
C3 C5 C6 C7 C8 C35: library part GRT033R60J104KE01J, "Ceramic Capacitor, Multilayer, Ceramic, 6.3V, 10% +Tol, 10% -Tol, X5R, 15% TC, 0.1uF, Surface Mount, 0201", .Case/Package=0201, .Voltage Rating (DC)=6.3V, Dielectric Material=Ceramic, Manufacturer=Murata, Manufacturer Lifecycle Status="IN PRODUCTION", Max Operating Temperature=85°C, Min Operating Temperature=-55°C, Supplier Part Number=81-GRT033R60J104KE1J, Tolerance=10%, Case/Package=0201, Category="Ceramic Capacitors", ComponentLink1Description=https://datasheet.octopart.com:443/GRT033R60J104KE01J-Murata-datasheet-141283033.pdf?src-supplier=Geoflip, ComponentLink1URL=https://datasheet.octopart.com:443/GRT033R60J104KE01J-Murata-datasheet-141283033.pdf?src-supplier=Geoflip, ComponentLink2Description=https://datasheet.octopart.com:443/GRT033R60J104KE01J-Murata-datasheet-140710645.pdf?src-supplier=Ciiva, ComponentLink2URL=https://datasheet.octopart.com:443/GRT033R60J104KE01J-Murata-datasheet-140710645.pdf?src-supplier=Ciiva, ComponentLink3Description=https://datasheet.octopart.com:443/GRT033R60J104KE01J-Murata-datasheet-138748272.pdf?src-supplier=Ciiva, ComponentLink3URL=https://datasheet.octopart.com:443/GRT033R60J104KE01J-Murata-datasheet-138748272.pdf?src-supplier=Ciiva, ComponentLink4Description=http://sigma.octopart.com:80/reach_statement/Murata-company-16.pdf?src-supplier=Compliance+Statements, ComponentLink4URL=http://sigma.octopart.com:80/reach_statement/Murata-company-16.pdf?src-supplier=Compliance+Statements, Height=300µm, Length=600µm, Lifecycle Status=Production, Manufacturer Part Number=GRT033R60J104KE01J, Material=Ceramic, Mounting Technology="Surface Mount", Number of Terminals=2, Pricing="1=0,1, 10=0,017, 50=0,017, 100=0,014, 1000=0,009, 10000=0,007 (USD)", REACH SVHC=Yes, RoHS=Compliant, Stock=150000, Supplier=Mouser, Supplier 1=Mouser, Supplier Part Number 1=81-GRT033R60J104KE1J, Thickness=300µm, Voltage Rating=6.3V, Voltage Rating (DC)=6.3V, Width=300µm
C4: library part GRM188R60J105KA01D, "Ceramic Capacitor, Ceramic, 6.3V, 10% +Tol, 10% -Tol, X5R, 15% TC, 1uF, Surface Mount, 0603", .Case/Package=0603, .Voltage Rating (DC)=6.3V, Case Code (Metric)=1608, Dielectric=X5R, Dielectric Material=Ceramic, Insulation Resistance=500MΩ, Manufacturer=Murata, Manufacturer Lifecycle Status=NRND, Max Operating Temperature=85°C, Min Operating Temperature=-55°C, Supplier Part Number=81-GRM39R105K6.3, Tolerance=10%, Case Code (Imperial)=0603, Case/Package=0603, Category="Ceramic Capacitors", ComponentLink1Description=https://datasheet.octopart.com:443/GRM188R60J105KA01D-Murata-datasheet-7599024.pdf?src-supplier=Newark, ComponentLink1URL=https://datasheet.octopart.com:443/GRM188R60J105KA01D-Murata-datasheet-7599024.pdf?src-supplier=Newark, ComponentLink2Description=https://datasheet.octopart.com:443/GRM188R60J105KA01D-Murata-datasheet-101584256.pdf?src-supplier=element14+APAC, ComponentLink2URL=https://datasheet.octopart.com:443/GRM188R60J105KA01D-Murata-datasheet-101584256.pdf?src-supplier=element14+APAC, ComponentLink3Description=https://datasheet.octopart.com:443/GRM188R60J105KA01D-Murata-datasheet-49135294.pdf?src-supplier=element14+APAC, ComponentLink3URL=https://datasheet.octopart.com:443/GRM188R60J105KA01D-Murata-datasheet-49135294.pdf?src-supplier=element14+APAC, ComponentLink4Description=https://datasheet.octopart.com:443/GRM188R60J105KA01D-Murata-datasheet-165579666.pdf?src-supplier=TME, ComponentLink4URL=https://datasheet.octopart.com:443/GRM188R60J105KA01D-Murata-datasheet-165579666.pdf?src-supplier=TME, ComponentLink5Description=https://datasheet.octopart.com:443/GRM188R60J105KA01D-Murata-datasheet-59876780.pdf?src-supplier=TME, ComponentLink5URL=https://datasheet.octopart.com:443/GRM188R60J105KA01D-Murata-datasheet-59876780.pdf?src-supplier=TME, ComponentLink6Description=https://datasheet.octopart.com:443/GRM188R60J105KA01D-Murata-datasheet-140704005.pdf?src-supplier=Ciiva, ComponentLink6URL=https://datasheet.octopart.com:443/GRM188R60J105KA01D-Murata-datasheet-140704005.pdf?src-supplier=Ciiva, ComponentLink7Description=https://datasheet.octopart.com:443/GRM188R60J105KA01D-Murata-datasheet-138742778.pdf?src-supplier=Ciiva, ComponentLink7URL=https://datasheet.octopart.com:443/GRM188R60J105KA01D-Murata-datasheet-138742778.pdf?src-supplier=Ciiva, ComponentLink8Description=https://datasheet.octopart.com:443/GRM188R60J105KA01D-Murata-datasheet-102370999.pdf?src-supplier=Future+Electronics, ComponentLink8URL=https://datasheet.octopart.com:443/GRM188R60J105KA01D-Murata-datasheet-102370999.pdf?src-supplier=Future+Electronics, ComponentLink9Description=https://datasheet.octopart.com:443/GRM188R60J105KA01D-Murata-datasheet-22122223.pdf?src-supplier=Future+Electronics, ComponentLink9URL=https://datasheet.octopart.com:443/GRM188R60J105KA01D-Murata-datasheet-22122223.pdf?src-supplier=Future+Electronics, ComponentLink10Description=https://datasheet.octopart.com:443/GRM188R60J105KA01D-Murata-datasheet-14400986.pdf?src-supplier=Future+Electronics, ComponentLink10URL=https://datasheet.octopart.com:443/GRM188R60J105KA01D-Murata-datasheet-14400986.pdf?src-supplier=Future+Electronics, ComponentLink11Description=https://datasheet.octopart.com:443/GRM188R60J105KA01D-Murata-datasheet-44107491.pdf?src-supplier=Future+Electronics, ComponentLink11URL=https://datasheet.octopart.com:443/GRM188R60J105KA01D-Murata-datasheet-44107491.pdf?src-supplier=Future+Electronics, ComponentLink12Description=https://datasheet.octopart.com/GRM188R60J105KA01D-Murata-datasheet-12515295.pdf, ComponentLink12URL=https://datasheet.octopart.com/GRM188R60J105KA01D-Murata-datasheet-12515295.pdf, ComponentLink13Description=https://datasheet.octopart.com/GRM188R60J105KA01D-Murata-datasheet-12510076.pdf, ComponentLink13URL=https://datasheet.octopart.com/GRM188R60J105KA01D-Murata-datasheet-12510076.pdf, ComponentLink14Description=https://datasheet.octopart.com/GRM188R60J105KA01D-Murata-datasheet-11978611.pdf, ComponentLink14URL=https://datasheet.octopart.com/GRM188R60J105KA01D-Murata-datasheet-11978611.pdf, ComponentLink15Description=https://datasheet.octopart.com/GRM188R60J105KA01D-Murata-datasheet-10025737.pdf, ComponentLink15URL=https://datasheet.octopart.com/GRM188R60J105KA01D-Murata-datasheet-10025737.pdf, ComponentLink16Description=https://datasheet.octopart.com/GRM188R60J105KA01D-Murata-datasheet-8819587.pdf, ComponentLink16URL=https://datasheet.octopart.com/GRM188R60J105KA01D-Murata-datasheet-8819587.pdf, ComponentLink17Description=https://datasheet.octopart.com/GRM188R60J105KA01D-Murata-datasheet-14401024.pdf, ComponentLink17URL=https://datasheet.octopart.com/GRM188R60J105KA01D-Murata-datasheet-14401024.pdf, ComponentLink18Description=https://datasheet.octopart.com:443/GRM188R60J105KA01D-Murata-datasheet-102.pdf?src-supplier=DigiKey, ComponentLink18URL=https://datasheet.octopart.com:443/GRM188R60J105KA01D-Murata-datasheet-102.pdf?src-supplier=DigiKey, ComponentLink19Description=https://datasheet.octopart.com:443/GRM188R60J105KA01D-Murata-datasheet-112596.pdf?src-supplier=Sierra+IC, ComponentLink19URL=https://datasheet.octopart.com:443/GRM188R60J105KA01D-Murata-datasheet-112596.pdf?src-supplier=Sierra+IC, ComponentLink20Description=https://datasheet.octopart.com:443/GRM188R60J105KA01D-Murata-datasheet-516848.pdf?src-supplier=Farnell, ComponentLink20URL=https://datasheet.octopart.com:443/GRM188R60J105KA01D-Murata-datasheet-516848.pdf?src-supplier=Farnell, ComponentLink21Description=http://sigma.octopart.com:80/reach_statement/Murata-company-16.pdf?src-supplier=Compliance+Statements, ComponentLink21URL=http://sigma.octopart.com:80/reach_statement/Murata-company-16.pdf?src-supplier=Compliance+Statements, Depth=800µm, Height=800µm, Lead Free="Lead Free", Length=1.6mm, Lifecycle Status=NRND, Manufacturer Part Number=GRM188R60J105KA01D, Material=Ceramic, Mounting Technology="Surface Mount", Number of Terminals=2, Pins=2, Pricing="1=0,14, 10=0,056, 50=0,056, 100=0,049, 1000=0,035, 10000=0,019 (USD)", Radiation Hardening=No, REACH SVHC=Yes, RoHS=Compliant, Schedule B="8532240020, 8532240020|8532240020, 8532240020|8532240020|8532240020, 8532240020|8532240020|8532240020|8532240020", Stock=153012, Supplier=Mouser, Supplier 1=Mouser, Supplier Part Number 1=81-GRM39R105K6.3, Termination=SMD/SMT, Thickness=800µm, Voltage=6.3V, Voltage Rating=6.3V, Voltage Rating (DC)=6.3V, Width=800µm
C9 C10: library part GCM21BC72A105KE36L, "Ceramic Capacitor, Ceramic, 100V, 10% +Tol, 10% -Tol, X7S, 22% TC, 1uF, Surface Mount, 0805", .Case/Package=0805, .Voltage Rating (DC)=100V, Dielectric Material=Ceramic, Manufacturer=Murata, Manufacturer Lifecycle Status="IN PRODUCTION", Max Operating Temperature=125°C, Min Operating Temperature=-55°C, Supplier Part Number=81-GCM21BC72A105KE6L, Case/Package=0805, Category="Ceramic Capacitors", ComponentLink1Description=https://datasheet.octopart.com:443/GCM21BC72A105KE36L-Murata-datasheet-141268580.pdf?src-supplier=Ciiva, ComponentLink1URL=https://datasheet.octopart.com:443/GCM21BC72A105KE36L-Murata-datasheet-141268580.pdf?src-supplier=Ciiva, ComponentLink2Description=https://datasheet.octopart.com:443/GCM21BC72A105KE36L-Murata-datasheet-140660122.pdf?src-supplier=Ciiva, ComponentLink2URL=https://datasheet.octopart.com:443/GCM21BC72A105KE36L-Murata-datasheet-140660122.pdf?src-supplier=Ciiva, ComponentLink3Description=https://datasheet.octopart.com:443/GCM21BC72A105KE36L-Murata-datasheet-138719526.pdf?src-supplier=Ciiva, ComponentLink3URL=https://datasheet.octopart.com:443/GCM21BC72A105KE36L-Murata-datasheet-138719526.pdf?src-supplier=Ciiva, ComponentLink4Description=https://datasheet.octopart.com:443/GCM21BC72A105KE36L-Murata-datasheet-12511495.pdf?src-supplier=TME, ComponentLink4URL=https://datasheet.octopart.com:443/GCM21BC72A105KE36L-Murata-datasheet-12511495.pdf?src-supplier=TME, ComponentLink5Description=http://sigma.octopart.com:80/reach_statement/Murata-company-16.pdf?src-supplier=Compliance+Statements, ComponentLink5URL=http://sigma.octopart.com:80/reach_statement/Murata-company-16.pdf?src-supplier=Compliance+Statements, Height=1.25mm, Length=2mm, Lifecycle Status=Production, Manufacturer Part Number=GCM21BC72A105KE36L, Material=Ceramic, Mounting Technology="Surface Mount", Number of Terminals=2, Pricing="1=0,42, 10=0,188, 50=0,188, 100=0,164, 1000=0,123, 10000=0,085 (USD)", REACH SVHC=Yes, RoHS=Compliant, Schedule B="8532240020, 8532240020|8532240020, 8532240020|8532240020|8532240020, 8532240020|8532240020|8532240020|8532240020", Stock=5295, Supplier=Mouser, Supplier 1=Mouser, Supplier Part Number 1=81-GCM21BC72A105KE6L, Thickness=1.25mm, Voltage Rating=100V, Voltage Rating (DC)=100V, Width=1.25mm
C14 C15 C16 C17 C18 C19 C20 C21 C22 C23 C37: library part GRJ31CC72A475KE01K, "Ceramic Capacitor, Multilayer, Ceramic, 100V, 10% +Tol, 10% -Tol, X7S, 22% TC, 4.7uF, Surface Mount, 1206", .Case/Package=1206, .Voltage Rating (DC)=100V, Dielectric=X7S, Dielectric Material=Ceramic, Manufacturer=Murata, Manufacturer Lifecycle Status="IN PRODUCTION", Max Operating Temperature=125°C, Min Operating Temperature=-55°C, Supplier Part Number=81-GRJ31CC72A475KE1K, Case/Package=1206, Category="Ceramic Capacitors", ComponentLink1Description=https://datasheet.octopart.com:443/GRJ31CC72A475KE01K-Murata-datasheet-165579666.pdf?src-supplier=TME, ComponentLink1URL=https://datasheet.octopart.com:443/GRJ31CC72A475KE01K-Murata-datasheet-165579666.pdf?src-supplier=TME, ComponentLink2Description=https://datasheet.octopart.com/GRJ31CC72A475KE01K-Murata-datasheet-12515295.pdf, ComponentLink2URL=https://datasheet.octopart.com/GRJ31CC72A475KE01K-Murata-datasheet-12515295.pdf, ComponentLink3Description=https://datasheet.octopart.com/GRJ31CC72A475KE01K-Murata-datasheet-12510076.pdf, ComponentLink3URL=https://datasheet.octopart.com/GRJ31CC72A475KE01K-Murata-datasheet-12510076.pdf, ComponentLink4Description=https://datasheet.octopart.com/GRJ31CC72A475KE01K-Murata-datasheet-11978611.pdf, ComponentLink4URL=https://datasheet.octopart.com/GRJ31CC72A475KE01K-Murata-datasheet-11978611.pdf, ComponentLink5Description=https://datasheet.octopart.com/GRJ31CC72A475KE01K-Murata-datasheet-10025737.pdf, ComponentLink5URL=https://datasheet.octopart.com/GRJ31CC72A475KE01K-Murata-datasheet-10025737.pdf, ComponentLink6Description=https://datasheet.octopart.com/GRJ31CC72A475KE01K-Murata-datasheet-8819587.pdf, ComponentLink6URL=https://datasheet.octopart.com/GRJ31CC72A475KE01K-Murata-datasheet-8819587.pdf, ComponentLink7Description=http://sigma.octopart.com:80/reach_statement/Murata-company-16.pdf?src-supplier=Compliance+Statements, ComponentLink7URL=http://sigma.octopart.com:80/reach_statement/Murata-company-16.pdf?src-supplier=Compliance+Statements, Height=1.6mm, Length=3.2mm, Lifecycle Status=Production, Manufacturer Part Number=GRJ31CC72A475KE01K, Mounting Technology="Surface Mount", Number of Terminals=2, Pricing="1=0,8, 10=0,387, 50=0,387, 100=0,351, 1000=0,272, 10000=0,242 (USD)", REACH SVHC=Yes, RoHS=Compliant, Stock=47114, Supplier=Mouser, Supplier 1=Mouser, Supplier Part Number 1=81-GRJ31CC72A475KE1K, Thickness=1.6mm, Voltage Rating (DC)=100V, Width=1.6mm
C24 C25 C26 C28: library part GCJ188R72A104KA01D, "Cap Ceramic 0.1uF 100V X7R 10% Pad SMD 0603 Soft Termination 125C Automotive T/R", .Case/Package=0603, .Voltage Rating (DC)=100V, Case Code (Metric)=1608, Dielectric Material=Ceramic, Manufacturer=Murata, Manufacturer Lifecycle Status="IN PRODUCTION", Max Operating Temperature=125°C, Min Operating Temperature=-55°C, Ratings=AEC-Q200, Supplier Part Number 1=81-GCJ188R72A104KA1D, Tolerance=10%, Case Code (Imperial)=0603, Case/Package=0603, Category="Ceramic Capacitors", ComponentLink1Description=https://datasheet.octopart.com:443/GCJ188R72A104KA01D-Murata-datasheet-141264712.pdf?src-supplier=Geoflip, ComponentLink1URL=https://datasheet.octopart.com:443/GCJ188R72A104KA01D-Murata-datasheet-141264712.pdf?src-supplier=Geoflip, ComponentLink2Description=https://datasheet.octopart.com:443/GCJ188R72A104KA01D-Murata-datasheet-140654819.pdf?src-supplier=Ciiva, ComponentLink2URL=https://datasheet.octopart.com:443/GCJ188R72A104KA01D-Murata-datasheet-140654819.pdf?src-supplier=Ciiva, ComponentLink3Description=https://datasheet.octopart.com:443/GCJ188R72A104KA01D-Murata-datasheet-138714490.pdf?src-supplier=Ciiva, ComponentLink3URL=https://datasheet.octopart.com:443/GCJ188R72A104KA01D-Murata-datasheet-138714490.pdf?src-supplier=Ciiva, ComponentLink4Description=https://datasheet.octopart.com:443/GCJ188R72A104KA01D-Murata-datasheet-165611796.pdf?src-supplier=TME, ComponentLink4URL=https://datasheet.octopart.com:443/GCJ188R72A104KA01D-Murata-datasheet-165611796.pdf?src-supplier=TME, ComponentLink5Description=https://datasheet.octopart.com:443/GCJ188R72A104KA01D-Murata-datasheet-128592638.pdf?src-supplier=X-ON, ComponentLink5URL=https://datasheet.octopart.com:443/GCJ188R72A104KA01D-Murata-datasheet-128592638.pdf?src-supplier=X-ON, ComponentLink6Description=https://datasheet.octopart.com:443/GCJ188R72A104KA01D-Murata-datasheet-78375067.pdf?src-supplier=Future+Electronics, ComponentLink6URL=https://datasheet.octopart.com:443/GCJ188R72A104KA01D-Murata-datasheet-78375067.pdf?src-supplier=Future+Electronics, ComponentLink7Description=https://datasheet.octopart.com:443/GCJ188R72A104KA01D-Murata-datasheet-12532847.pdf?src-supplier=Future+Electronics, ComponentLink7URL=https://datasheet.octopart.com:443/GCJ188R72A104KA01D-Murata-datasheet-12532847.pdf?src-supplier=Future+Electronics, ComponentLink8Description=http://sigma.octopart.com:80/reach_statement/Murata-company-16.pdf?src-supplier=Compliance+Statements, ComponentLink8URL=http://sigma.octopart.com:80/reach_statement/Murata-company-16.pdf?src-supplier=Compliance+Statements, Features="Soft Termination", Height=800µm, Lead Free="Lead Free", Length=1.6mm, Lifecycle Status=Production, Manufacturer Part Number=GCJ188R72A104KA01D, Material=Ceramic, Mounting Technology="Surface Mount", Number of Terminals=2, Pricing="4000=0,02065 (USD)", REACH SVHC=Yes, RoHS=Compliant, Schedule B="8532240020, 8532240020|8532240020, 8532240020|8532240020|8532240020, 8532240020|8532240020|8532240020|8532240020", Stock=848000, Supplier=Avnet, Supplier 1=Mouser, Supplier Part Number=GCJ188R72A104KA01D, Voltage Rating=100V, Voltage Rating (DC)=100V, Width=800µm
C27: library part C1608X7R1E105K080AE, "25V 1uF X7R 卤10% 0603 Multilayer Ceramic Capacitors MLCC - SMD/SMT ROHS", .Case/Package=0603, .Voltage Rating (DC)=25V, Case Code (Metric)=1608, Dielectric Material=Ceramic, Manufacturer=TDK, Manufacturer Lifecycle Status=PRODUCTION, Max Operating Temperature=125°C, Min Operating Temperature=-55°C, Supplier Part Number=810-C1608X7R1E105KAE, Tolerance=10%, Case Code (Imperial)=0603, Case/Package=0603, Category="Ceramic Capacitors", China RoHS=Compliant, ComponentLink1Description=https://datasheet.octopart.com:443/C1608X7R1E105K080AE-TDK-datasheet-182135025.pdf?src-supplier=TME, ComponentLink1URL=https://datasheet.octopart.com:443/C1608X7R1E105K080AE-TDK-datasheet-182135025.pdf?src-supplier=TME, ComponentLink2Description=https://datasheet.octopart.com:443/C1608X7R1E105K080AE-TDK-datasheet-159617022.pdf?src-supplier=TME, ComponentLink2URL=https://datasheet.octopart.com:443/C1608X7R1E105K080AE-TDK-datasheet-159617022.pdf?src-supplier=TME, ComponentLink3Description=https://datasheet.octopart.com:443/C1608X7R1E105K080AE-TDK-datasheet-151546525.pdf?src-supplier=ODG+(Origin+Data+Global), ComponentLink3URL=https://datasheet.octopart.com:443/C1608X7R1E105K080AE-TDK-datasheet-151546525.pdf?src-supplier=ODG+(Origin+Data+Global), ComponentLink4Description=https://datasheet.octopart.com:443/C1608X7R1E105K080AE-TDK-datasheet-60278151.pdf?src-supplier=Future+Electronics, ComponentLink4URL=https://datasheet.octopart.com:443/C1608X7R1E105K080AE-TDK-datasheet-60278151.pdf?src-supplier=Future+Electronics, Features="Soft Termination", Height=800µm, Length=1.6mm, Lifecycle Status=Production, Manufacturer Part Number=C1608X7R1E105K080AE, Material=Ceramic, Max Length=1.8mm, Max Width=950µm, Min Length=1.5mm, Min Width=700µm, Mounting Technology="Surface Mount", Number of Terminals=2, Pricing="1=0,24, 10=0,1, 50=0,1, 100=0,088, 1000=0,062, 10000=0,044 (USD)", REACH SVHC=Yes, RoHS=Compliant, Schedule B="8532240020, 8532240020|8532240020|8532240020|8532240020|8532240020", Stock=89352, Supplier=Mouser, Supplier 1=Mouser, Supplier Part Number 1=810-C1608X7R1E105KAE, Thickness=939.8µm, Voltage Rating=25V, Voltage Rating (DC)=25V, Width=800µm
C29: library part C0603X473K1RACTU, "Multilayer Ceramic Capacitors MLCC - SMD/SMT 100V 0.047uF X7R 0603 10% Flex Soft", .Case/Package=0603, .Voltage Rating (DC)=100V, Case Code (Metric)=1608, Dielectric=X7R, Dielectric Material=Ceramic, Manufacturer=KEMET, Max Operating Temperature=125°C, Min Operating Temperature=-55°C, Supplier Part Number=80-C0603X473K1R, Tolerance=10%, Case Code (Imperial)=0603, Case/Package=0603, Category="Ceramic Capacitors", China RoHS=Compliant, ComponentLink1Description=https://datasheet.octopart.com:443/C0603X473K1RACTU-KEMET-datasheet-182040354.pdf?src-supplier=IHS, ComponentLink1URL=https://datasheet.octopart.com:443/C0603X473K1RACTU-KEMET-datasheet-182040354.pdf?src-supplier=IHS, ComponentLink2Description=https://datasheet.octopart.com:443/C0603X473K1RACTU-KEMET-datasheet-149523211.pdf?src-supplier=Farnell, ComponentLink2URL=https://datasheet.octopart.com:443/C0603X473K1RACTU-KEMET-datasheet-149523211.pdf?src-supplier=Farnell, ComponentLink3Description=https://datasheet.octopart.com:443/C0603X473K1RACTU-KEMET-datasheet-182910228.pdf?src-supplier=Farnell, ComponentLink3URL=https://datasheet.octopart.com:443/C0603X473K1RACTU-KEMET-datasheet-182910228.pdf?src-supplier=Farnell, ComponentLink4Description=https://datasheet.octopart.com:443/C0603X473K1RACTU-KEMET-datasheet-158079525.pdf?src-supplier=Electro+Sonic, ComponentLink4URL=https://datasheet.octopart.com:443/C0603X473K1RACTU-KEMET-datasheet-158079525.pdf?src-supplier=Electro+Sonic, ComponentLink5Description=https://datasheet.octopart.com:443/C0603X473K1RACTU-KEMET-datasheet-189885820.pdf?src-supplier=element14+APAC, ComponentLink5URL=https://datasheet.octopart.com:443/C0603X473K1RACTU-KEMET-datasheet-189885820.pdf?src-supplier=element14+APAC, ComponentLink6Description=https://datasheet.octopart.com/C0603X473K1RACTU-KEMET-datasheet-84169754.pdf, ComponentLink6URL=https://datasheet.octopart.com/C0603X473K1RACTU-KEMET-datasheet-84169754.pdf, ComponentLink7Description=https://datasheet.octopart.com:443/C0603X473K1RACTU-KEMET-datasheet-182857673.pdf?src-supplier=Newark, ComponentLink7URL=https://datasheet.octopart.com:443/C0603X473K1RACTU-KEMET-datasheet-182857673.pdf?src-supplier=Newark, Depth=800µm, Features="Soft Termination", Height=800µm, Length=1.6mm, Lifecycle Status=Production, Manufacturer Part Number=C0603X473K1RACTU, Mounting Technology="Surface Mount", Number of Terminals=2, Packaging="Tape and Reel", Pricing="1=0,44, 10=0,198, 50=0,198, 100=0,162, 1000=0,131, 10000=0,101 (USD)", REACH SVHC=Yes, RoHS=Compliant, Stock=189, Supplier=Mouser, Supplier 1=Mouser, Supplier Part Number 1=80-C0603X473K1R, Termination=SMD/SMT, Thickness=863.6µm, Voltage Rating=100V, Voltage Rating (DC)=100V, Width=800µm
C30 C32 C33: library part 08056C102JAT2A, "Multilayer Ceramic Capacitors MLCC - SMD/SMT 6.3V 1000pF X7R 0805 5%", .Case/Package=0805, .Voltage Rating (DC)=6.3V, Case Code (Metric)=2012, Dielectric=X7R, Manufacturer="KYOCERA AVX", Max Operating Temperature=125°C, Min Operating Temperature=-55°C, Supplier Part Number=581-08056C102JAT2A, Tolerance=5%, Case Code (Imperial)=0805, Case/Package=0805, Category="Ceramic Capacitors", ComponentLink1Description=https://datasheet.octopart.com/08056C102JAT2A-KYOCERA-AVX-datasheet-13516023.pdf, ComponentLink1URL=https://datasheet.octopart.com/08056C102JAT2A-KYOCERA-AVX-datasheet-13516023.pdf, ComponentLink2Description=http://sigma.octopart.com:80/reach_statement/AVX-company-19.pdf?src-supplier=Compliance+Statements, ComponentLink2URL=http://sigma.octopart.com:80/reach_statement/AVX-company-19.pdf?src-supplier=Compliance+Statements, ComponentLink3Description=http://sigma.octopart.com:80/conflict_mineral_statement/AVX-company-34.pdf?src-supplier=Compliance+Statements, ComponentLink3URL=http://sigma.octopart.com:80/conflict_mineral_statement/AVX-company-34.pdf?src-supplier=Compliance+Statements, Depth=1.25mm, Dissipation Factor=5%, Length=2.01mm, Manufacturer Part Number=08056C102JAT2A, Mounting Technology="Surface Mount", Pricing="1=0,26, 10=0,167, 50=0,167, 100=0,099, 1000=0,072, 10000=0,057 (USD)", RoHS=Compliant, Stock=11081, Supplier=Mouser, Supplier 1=Mouser, Supplier Part Number 1=581-08056C102JAT2A, Termination=SMD/SMT, Thickness=939.8µm, Voltage Rating=6.3V, Voltage Rating (DC)=6.3V, Width=1.2446mm
C31 C34: library part 08056C105MAT2A, "Multilayer Ceramic Capacitors MLCC - SMD/SMT 6.3V 1uF X7R 0805 20%", .Case/Package=0805, .Voltage Rating (DC)=6.3V, Case Code (Metric)=2012, Dielectric=X7R, Manufacturer="KYOCERA AVX", Manufacturer Part Number=08056C102JAT2A, Max Operating Temperature=125°C, Min Operating Temperature=-55°C, Supplier Part Number=581-08056C102JAT2A, Supplier Part Number 1=581-08056C105MAT2A, Tolerance=5%, Case Code (Imperial)=0805, Case/Package=0805, Category="Ceramic Capacitors", ComponentLink1Description=https://datasheet.octopart.com/08056C102JAT2A-KYOCERA-AVX-datasheet-13516023.pdf, ComponentLink1URL=https://datasheet.octopart.com/08056C102JAT2A-KYOCERA-AVX-datasheet-13516023.pdf, ComponentLink2Description=http://sigma.octopart.com:80/reach_statement/AVX-company-19.pdf?src-supplier=Compliance+Statements, ComponentLink2URL=http://sigma.octopart.com:80/reach_statement/AVX-company-19.pdf?src-supplier=Compliance+Statements, ComponentLink3Description=http://sigma.octopart.com:80/conflict_mineral_statement/AVX-company-34.pdf?src-supplier=Compliance+Statements, ComponentLink3URL=http://sigma.octopart.com:80/conflict_mineral_statement/AVX-company-34.pdf?src-supplier=Compliance+Statements, ComponentLink4Description=https://datasheet.octopart.com:443/08056C105MAT2A-AVX-datasheet-78690206.pdf?src-supplier=Newark, ComponentLink4URL=https://datasheet.octopart.com:443/08056C105MAT2A-AVX-datasheet-78690206.pdf?src-supplier=Newark, ComponentLink5Description=https://datasheet.octopart.com:443/08056C105MAT2A-AVX-datasheet-8447489.pdf?src-supplier=Newark, ComponentLink5URL=https://datasheet.octopart.com:443/08056C105MAT2A-AVX-datasheet-8447489.pdf?src-supplier=Newark, ComponentLink6Description=https://datasheet.octopart.com/08056C105MAT2A-KYOCERA-AVX-datasheet-13516023.pdf, ComponentLink6URL=https://datasheet.octopart.com/08056C105MAT2A-KYOCERA-AVX-datasheet-13516023.pdf, Depth=1.25mm, Dissipation Factor=5%, Length=2.01mm, Mounting Technology="Surface Mount", Packaging="Tape & Reel", Pins=2, Pricing="1=0,26, 10=0,167, 50=0,167, 100=0,099, 1000=0,072, 10000=0,057 (USD)", Radiation Hardening=No, RoHS=Compliant, Stock=11081, Supplier=Mouser, Supplier 1=Mouser, Termination=SMD/SMT, Thickness=939.8µm, Voltage Rating=6.3V, Voltage Rating (DC)=6.3V, Width=1.2446mm